# Altium PCB fader2_pcb.PcbDoc (part 1 of 3)
Units mil, origin at the board's own origin, x right, y up, seen from the top; angles counter-clockwise.
Board outline 5700 x 3900 mil, 6 copper layers (TOP, GND1, PWR1, PWR2, GND4, BOT), stack 48.468 mil thick; 196 components, 127 nets, 1359 pads, 531 vias.
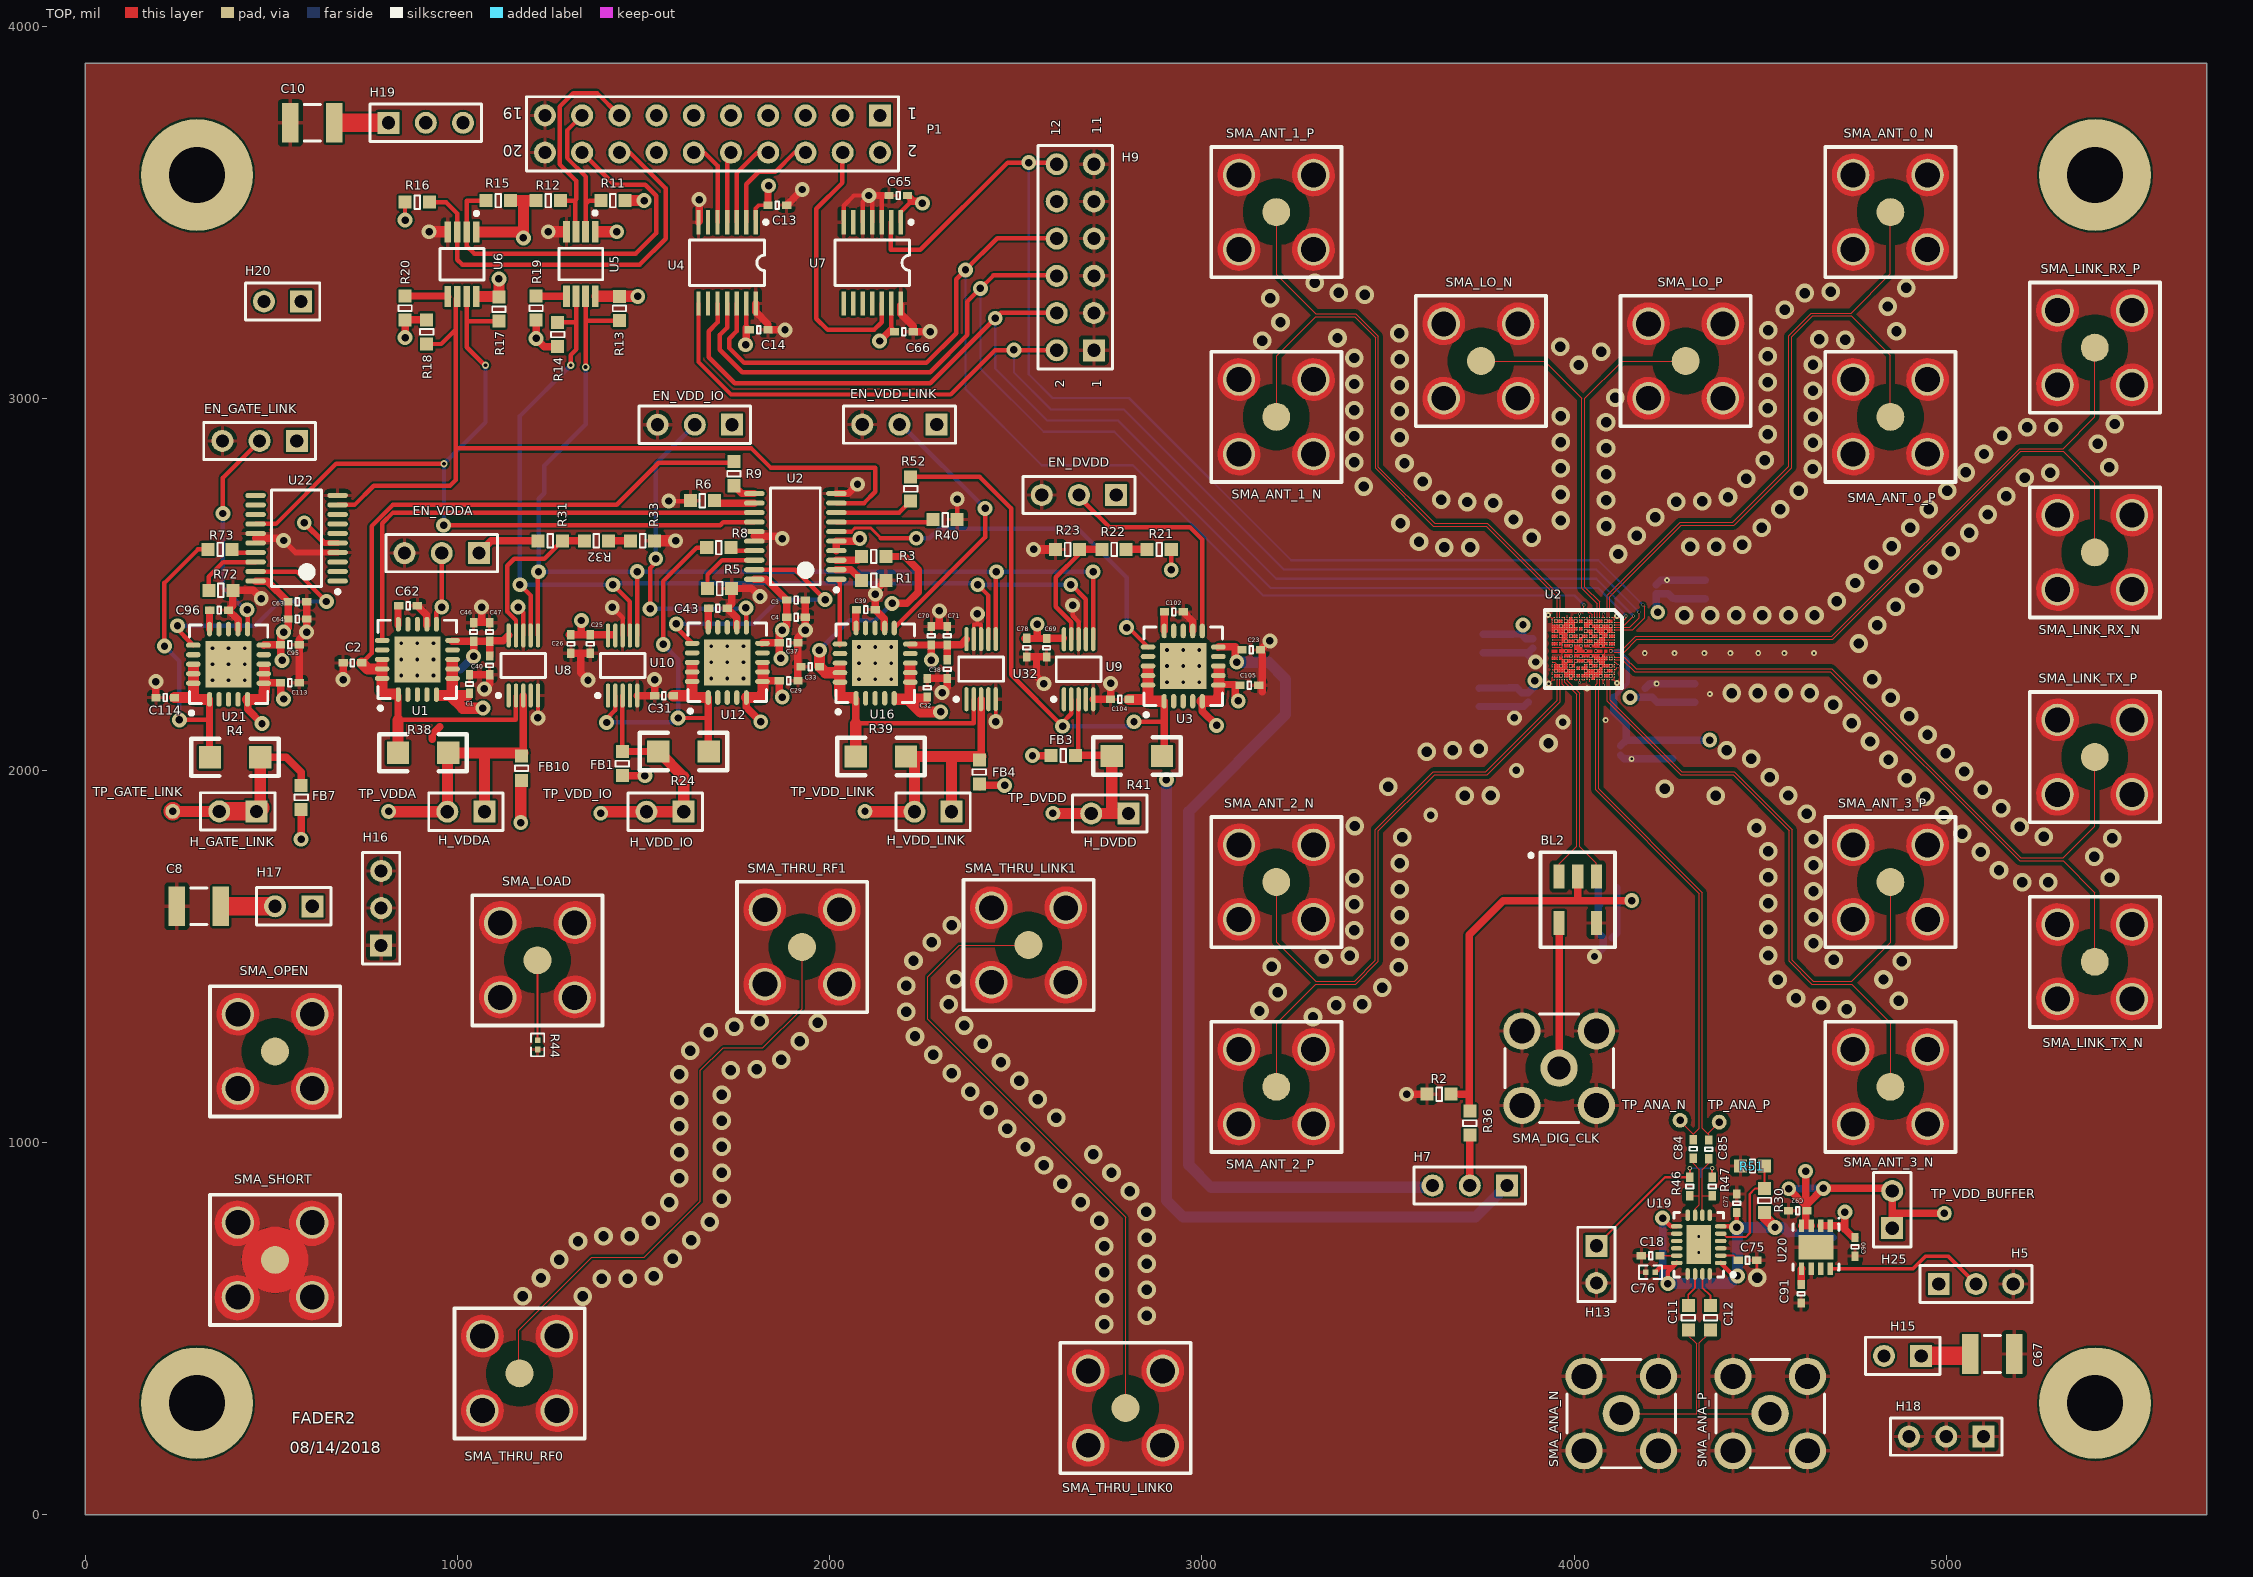
[diagram p0: TOP view]
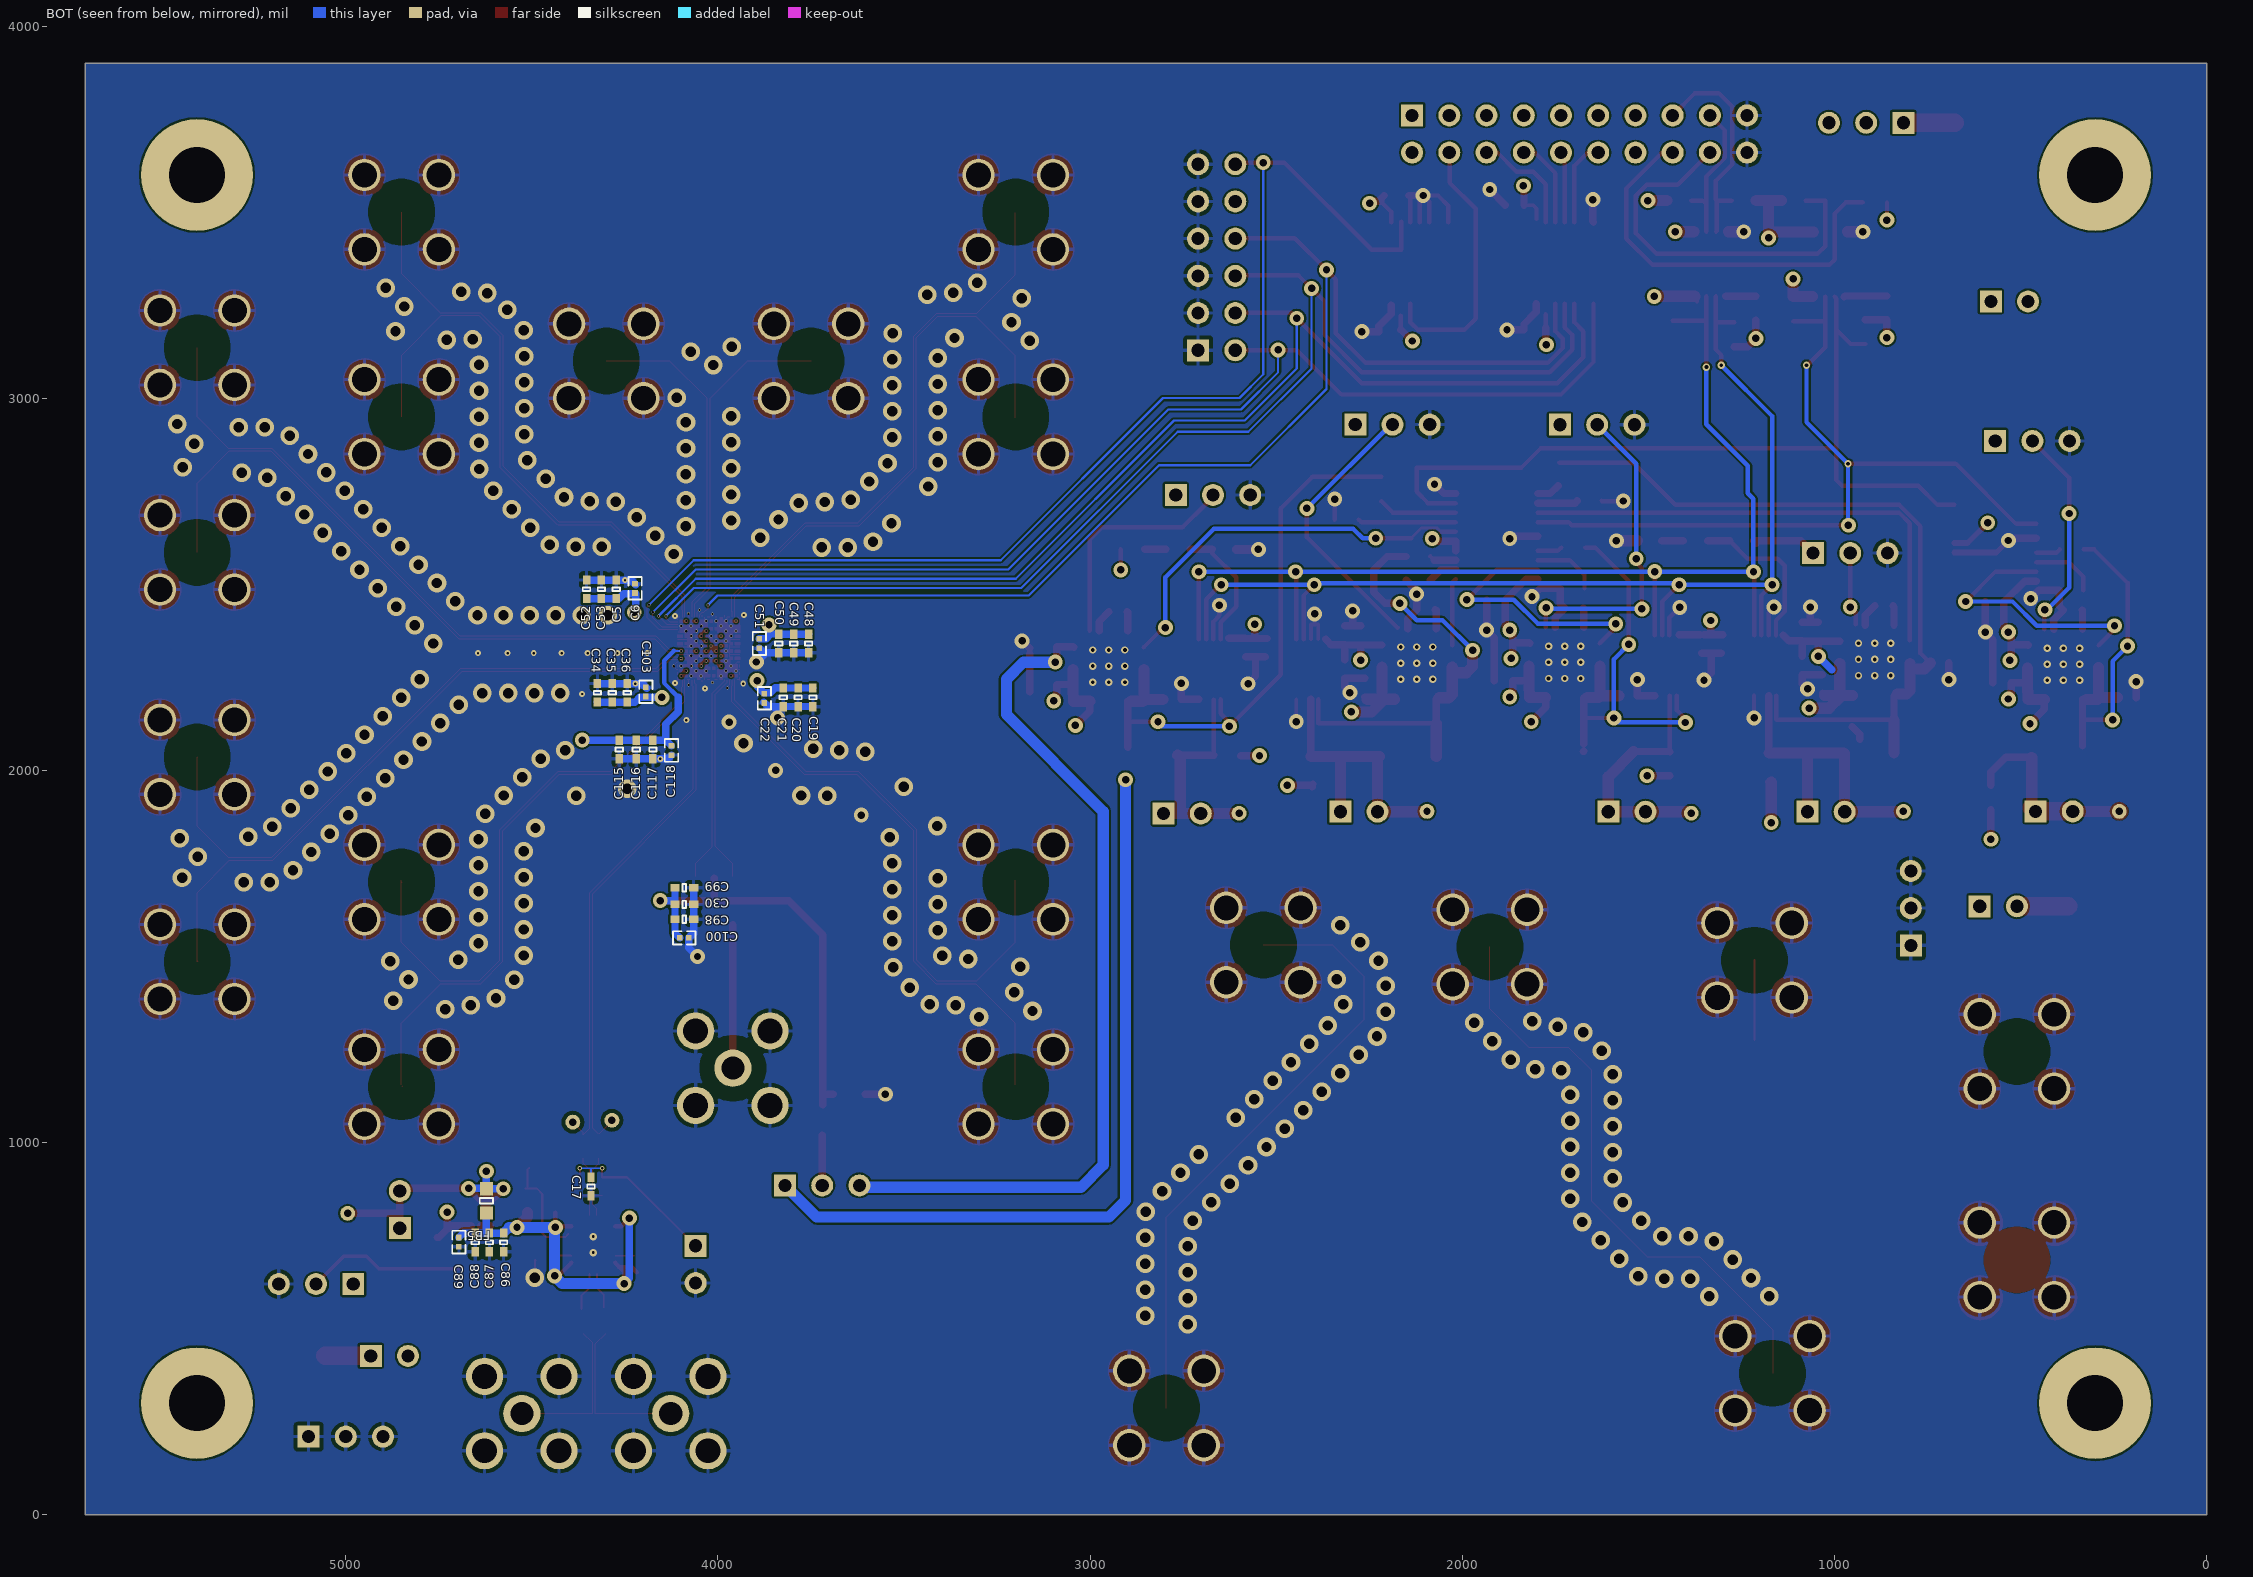
[diagram p1: BOT view, seen from below]
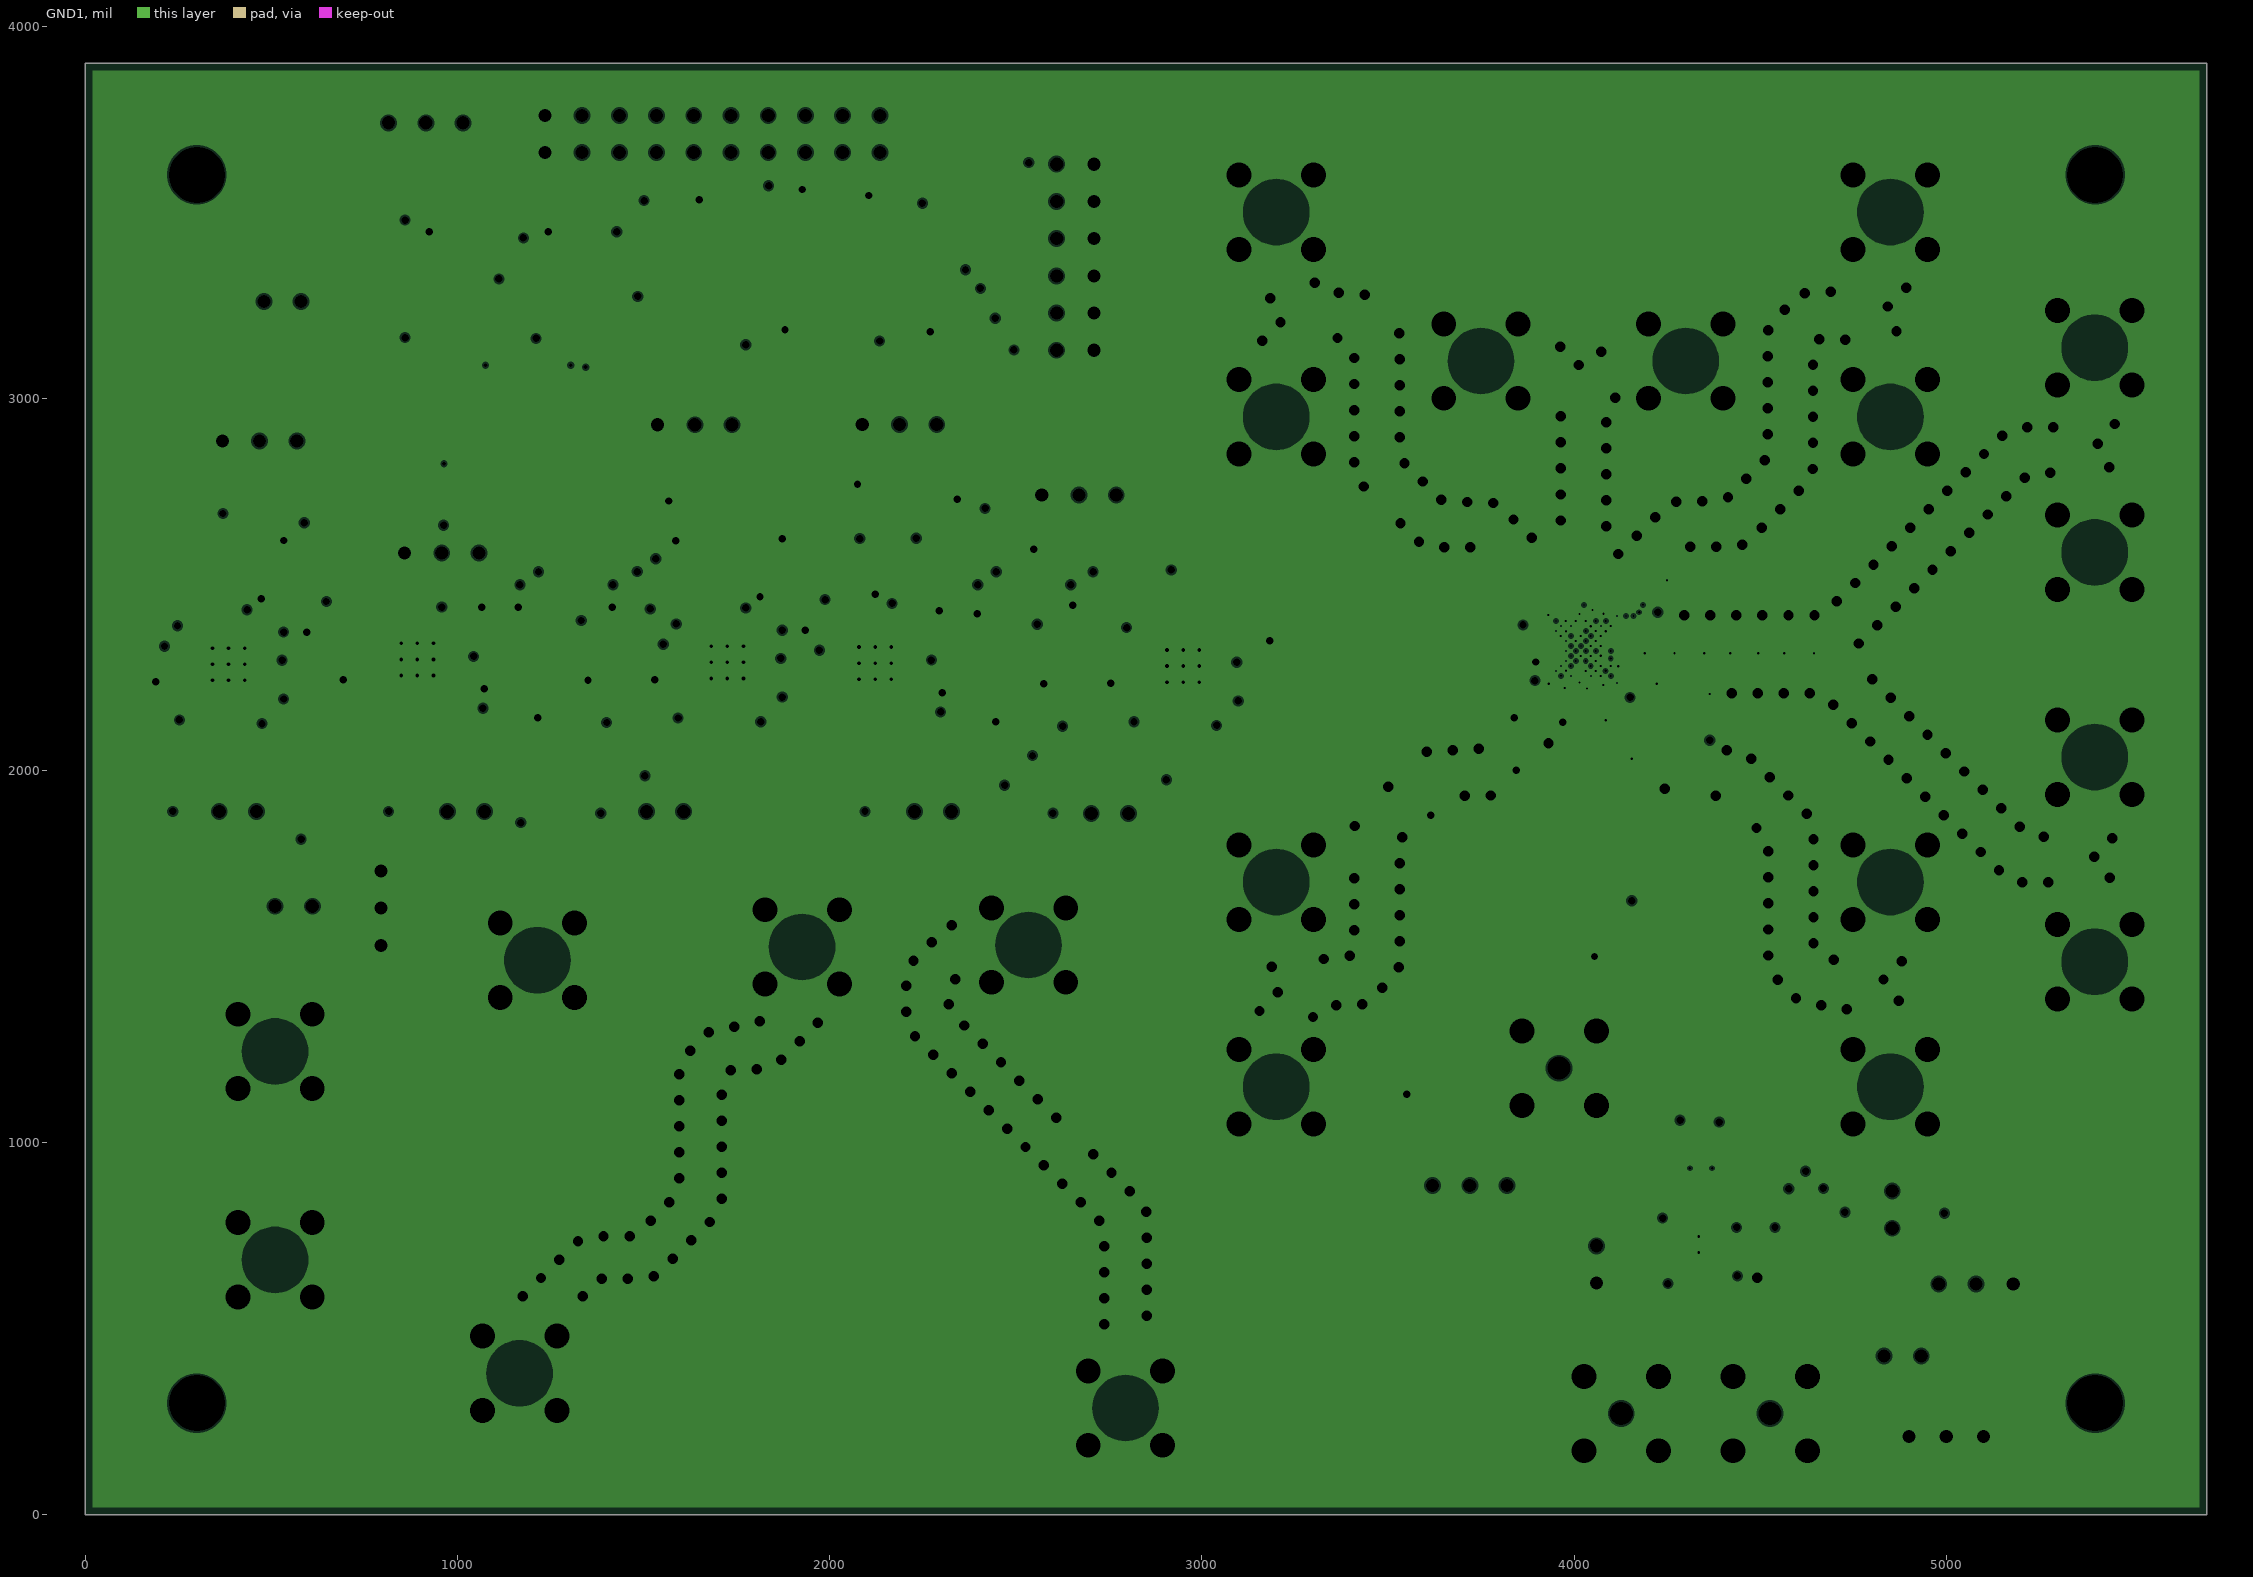
[diagram p2: GND1, clearances drawn from the general rule]
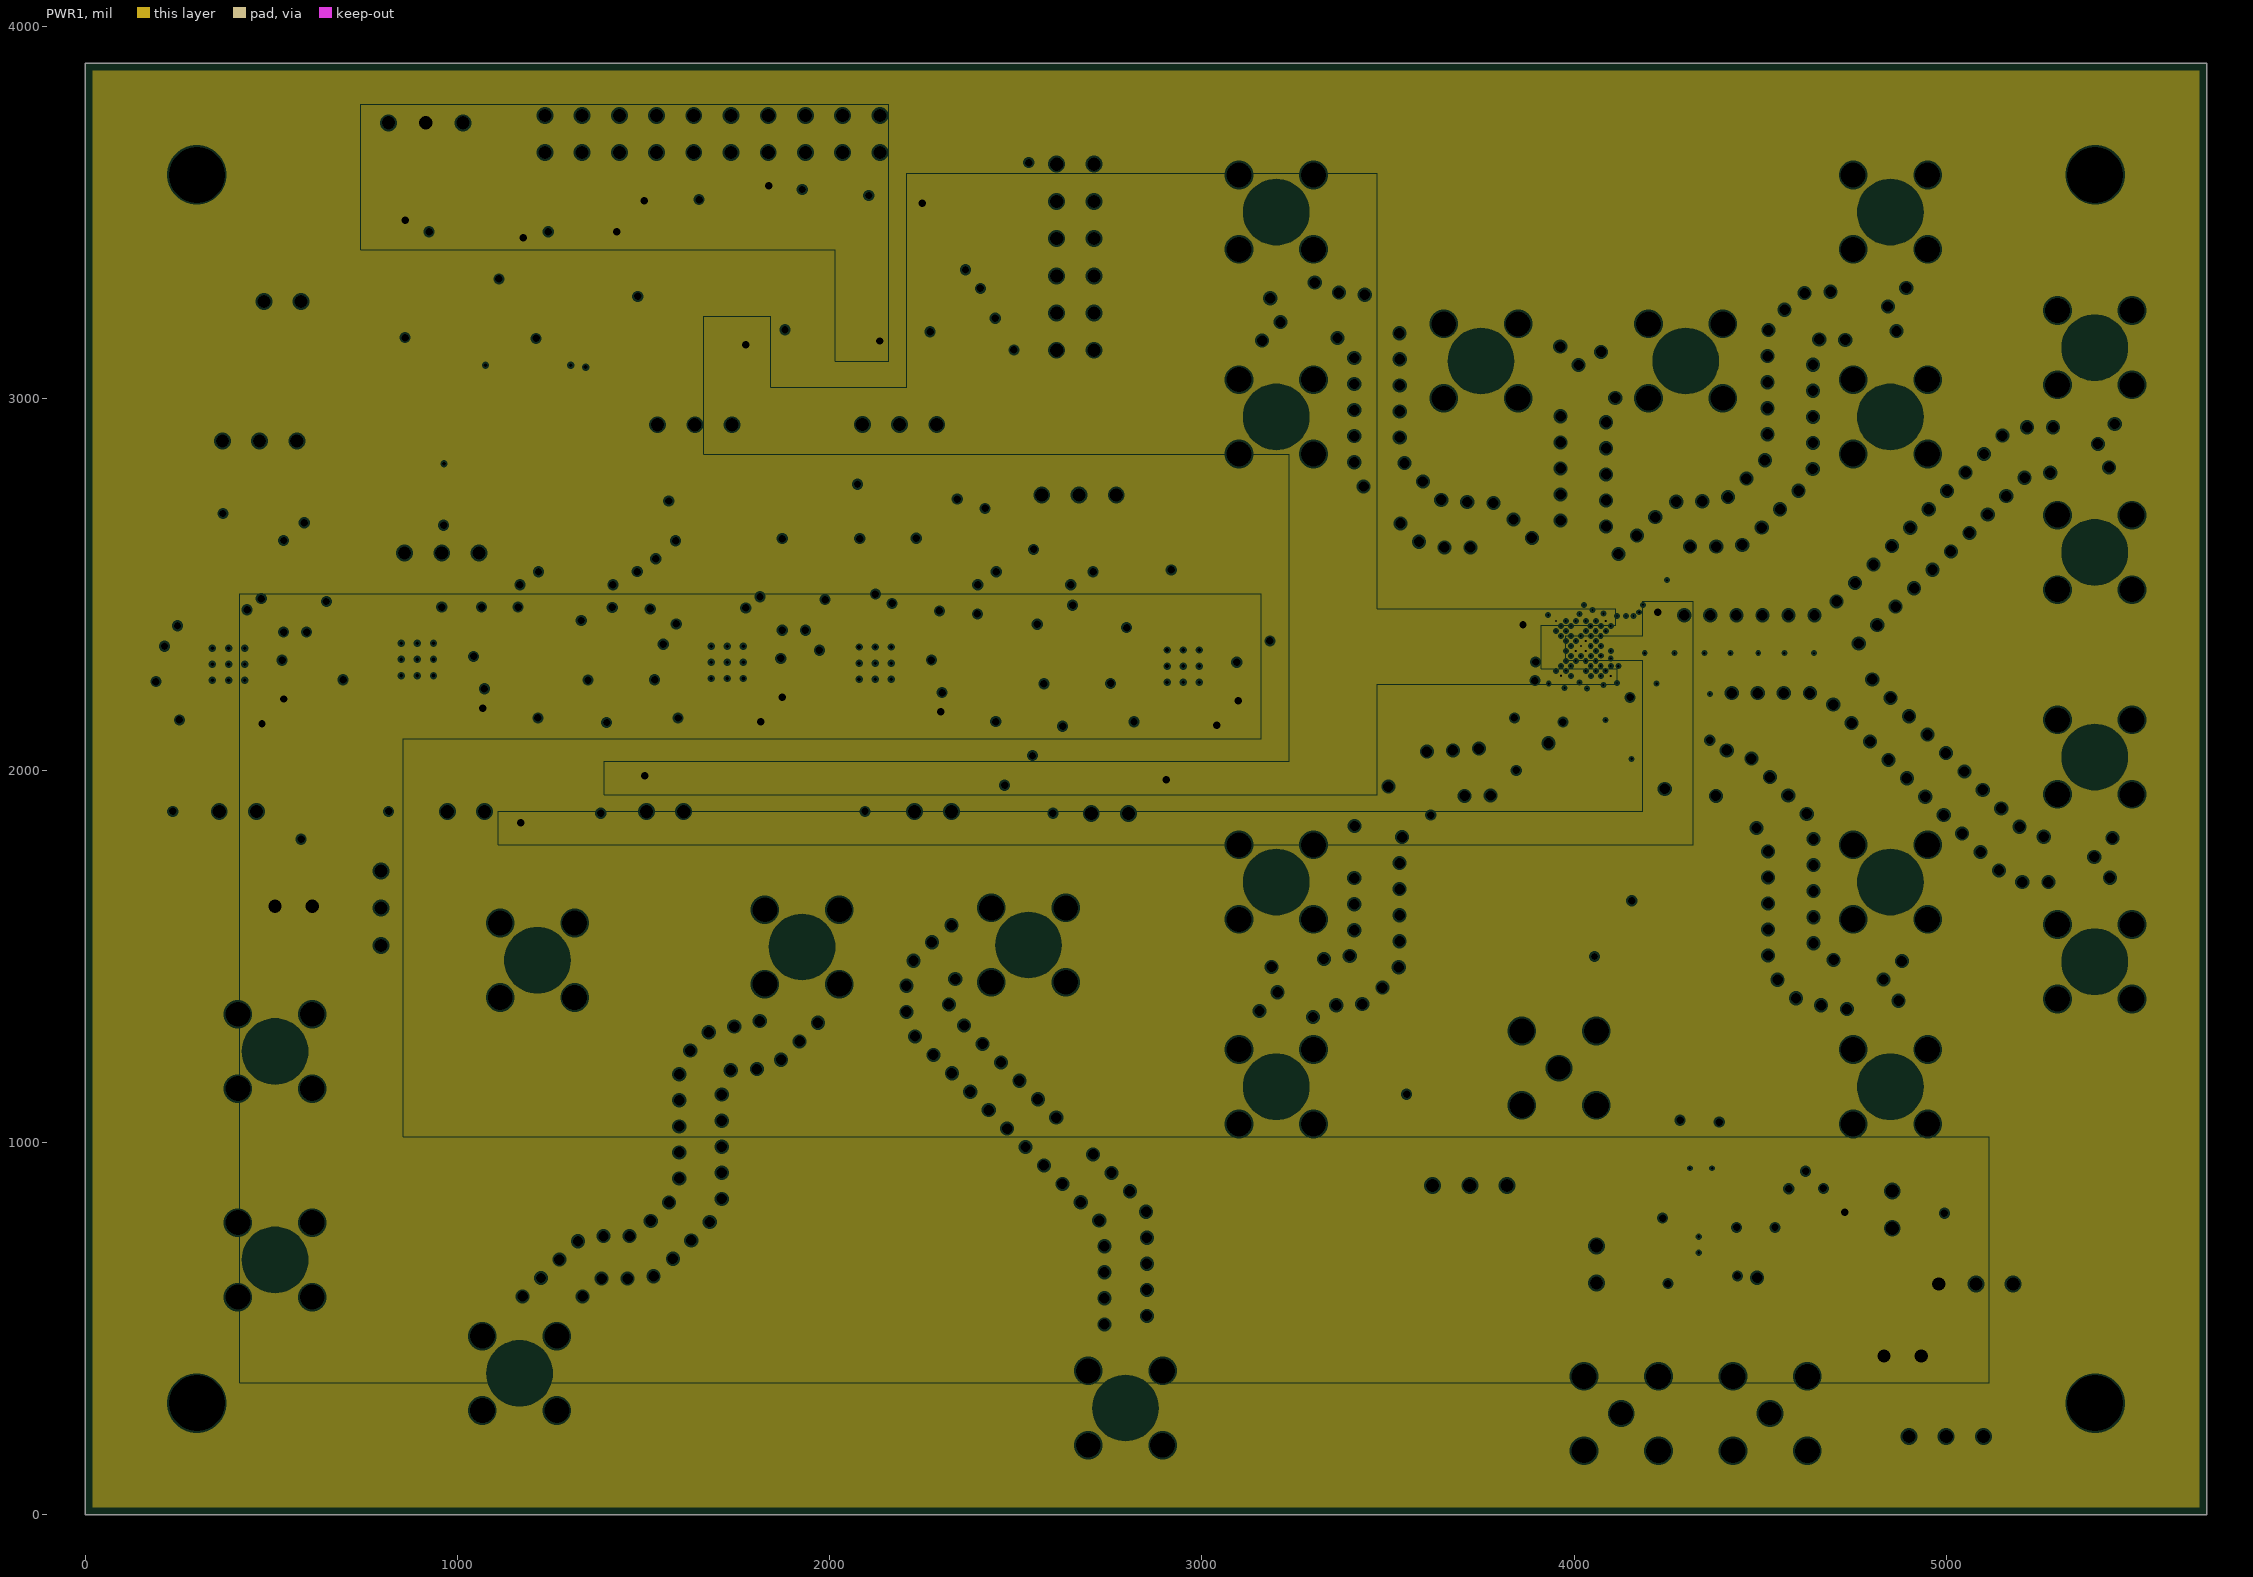
[diagram p3: PWR1, clearances drawn from the general rule]
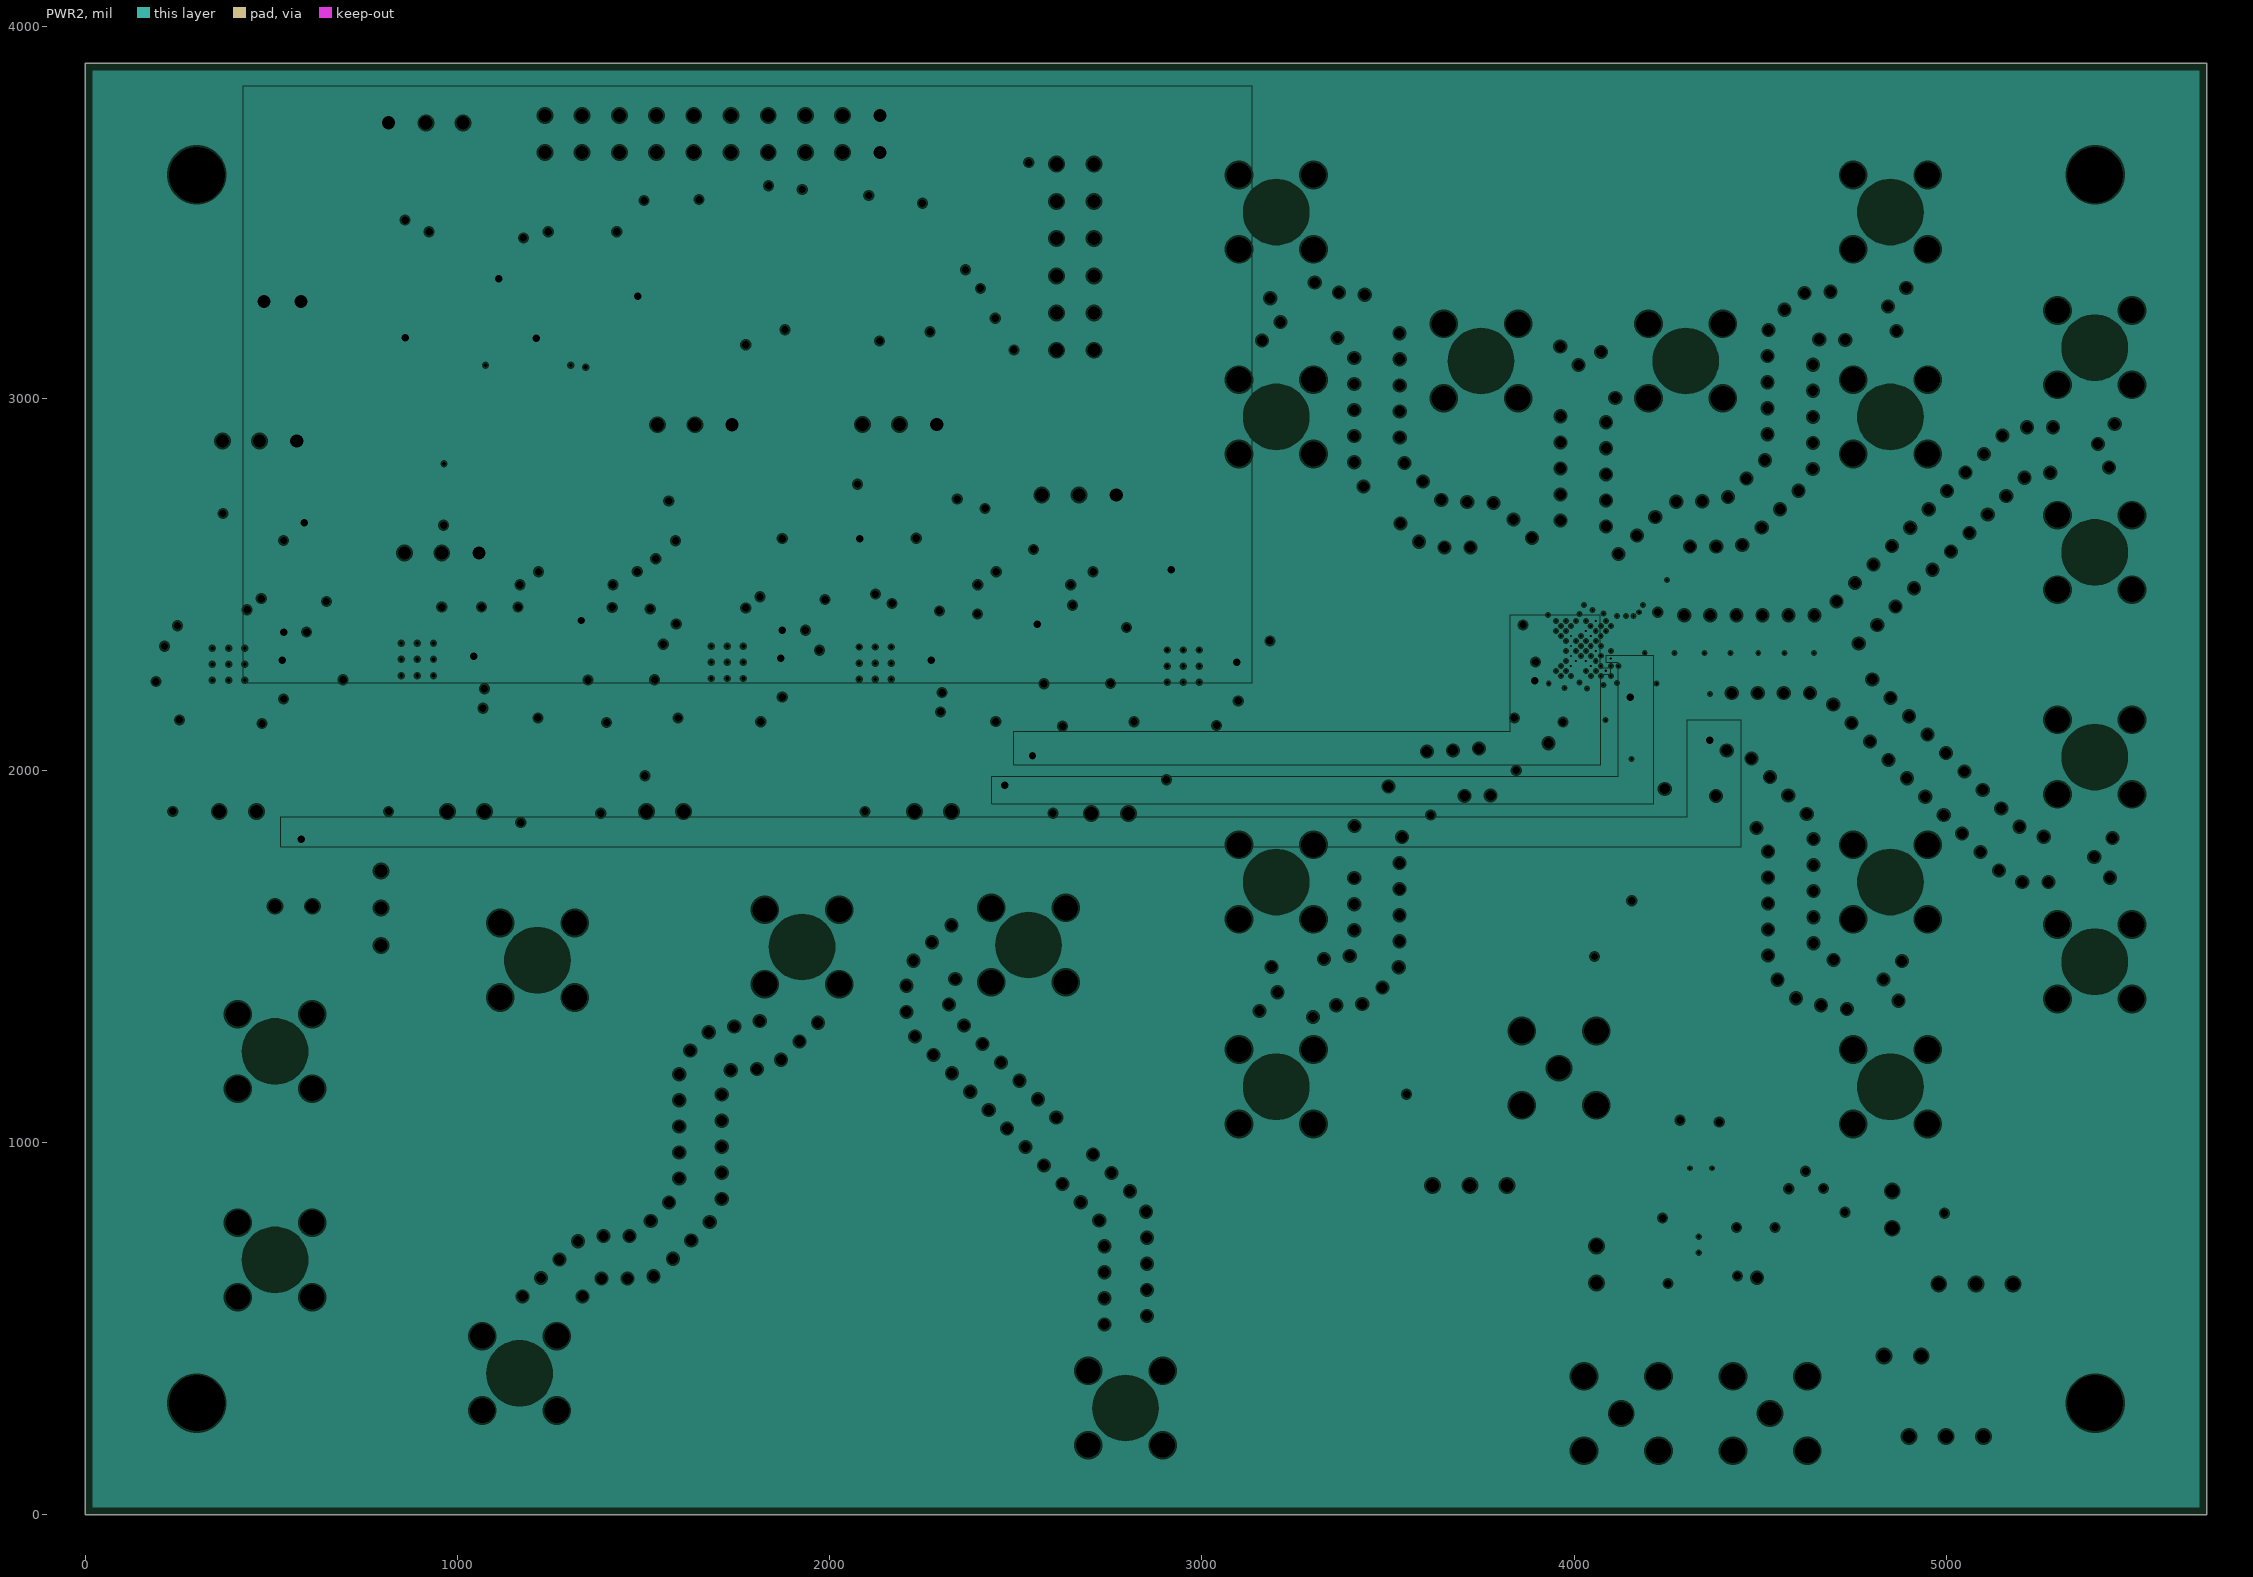
[diagram p4: PWR2, clearances drawn from the general rule]
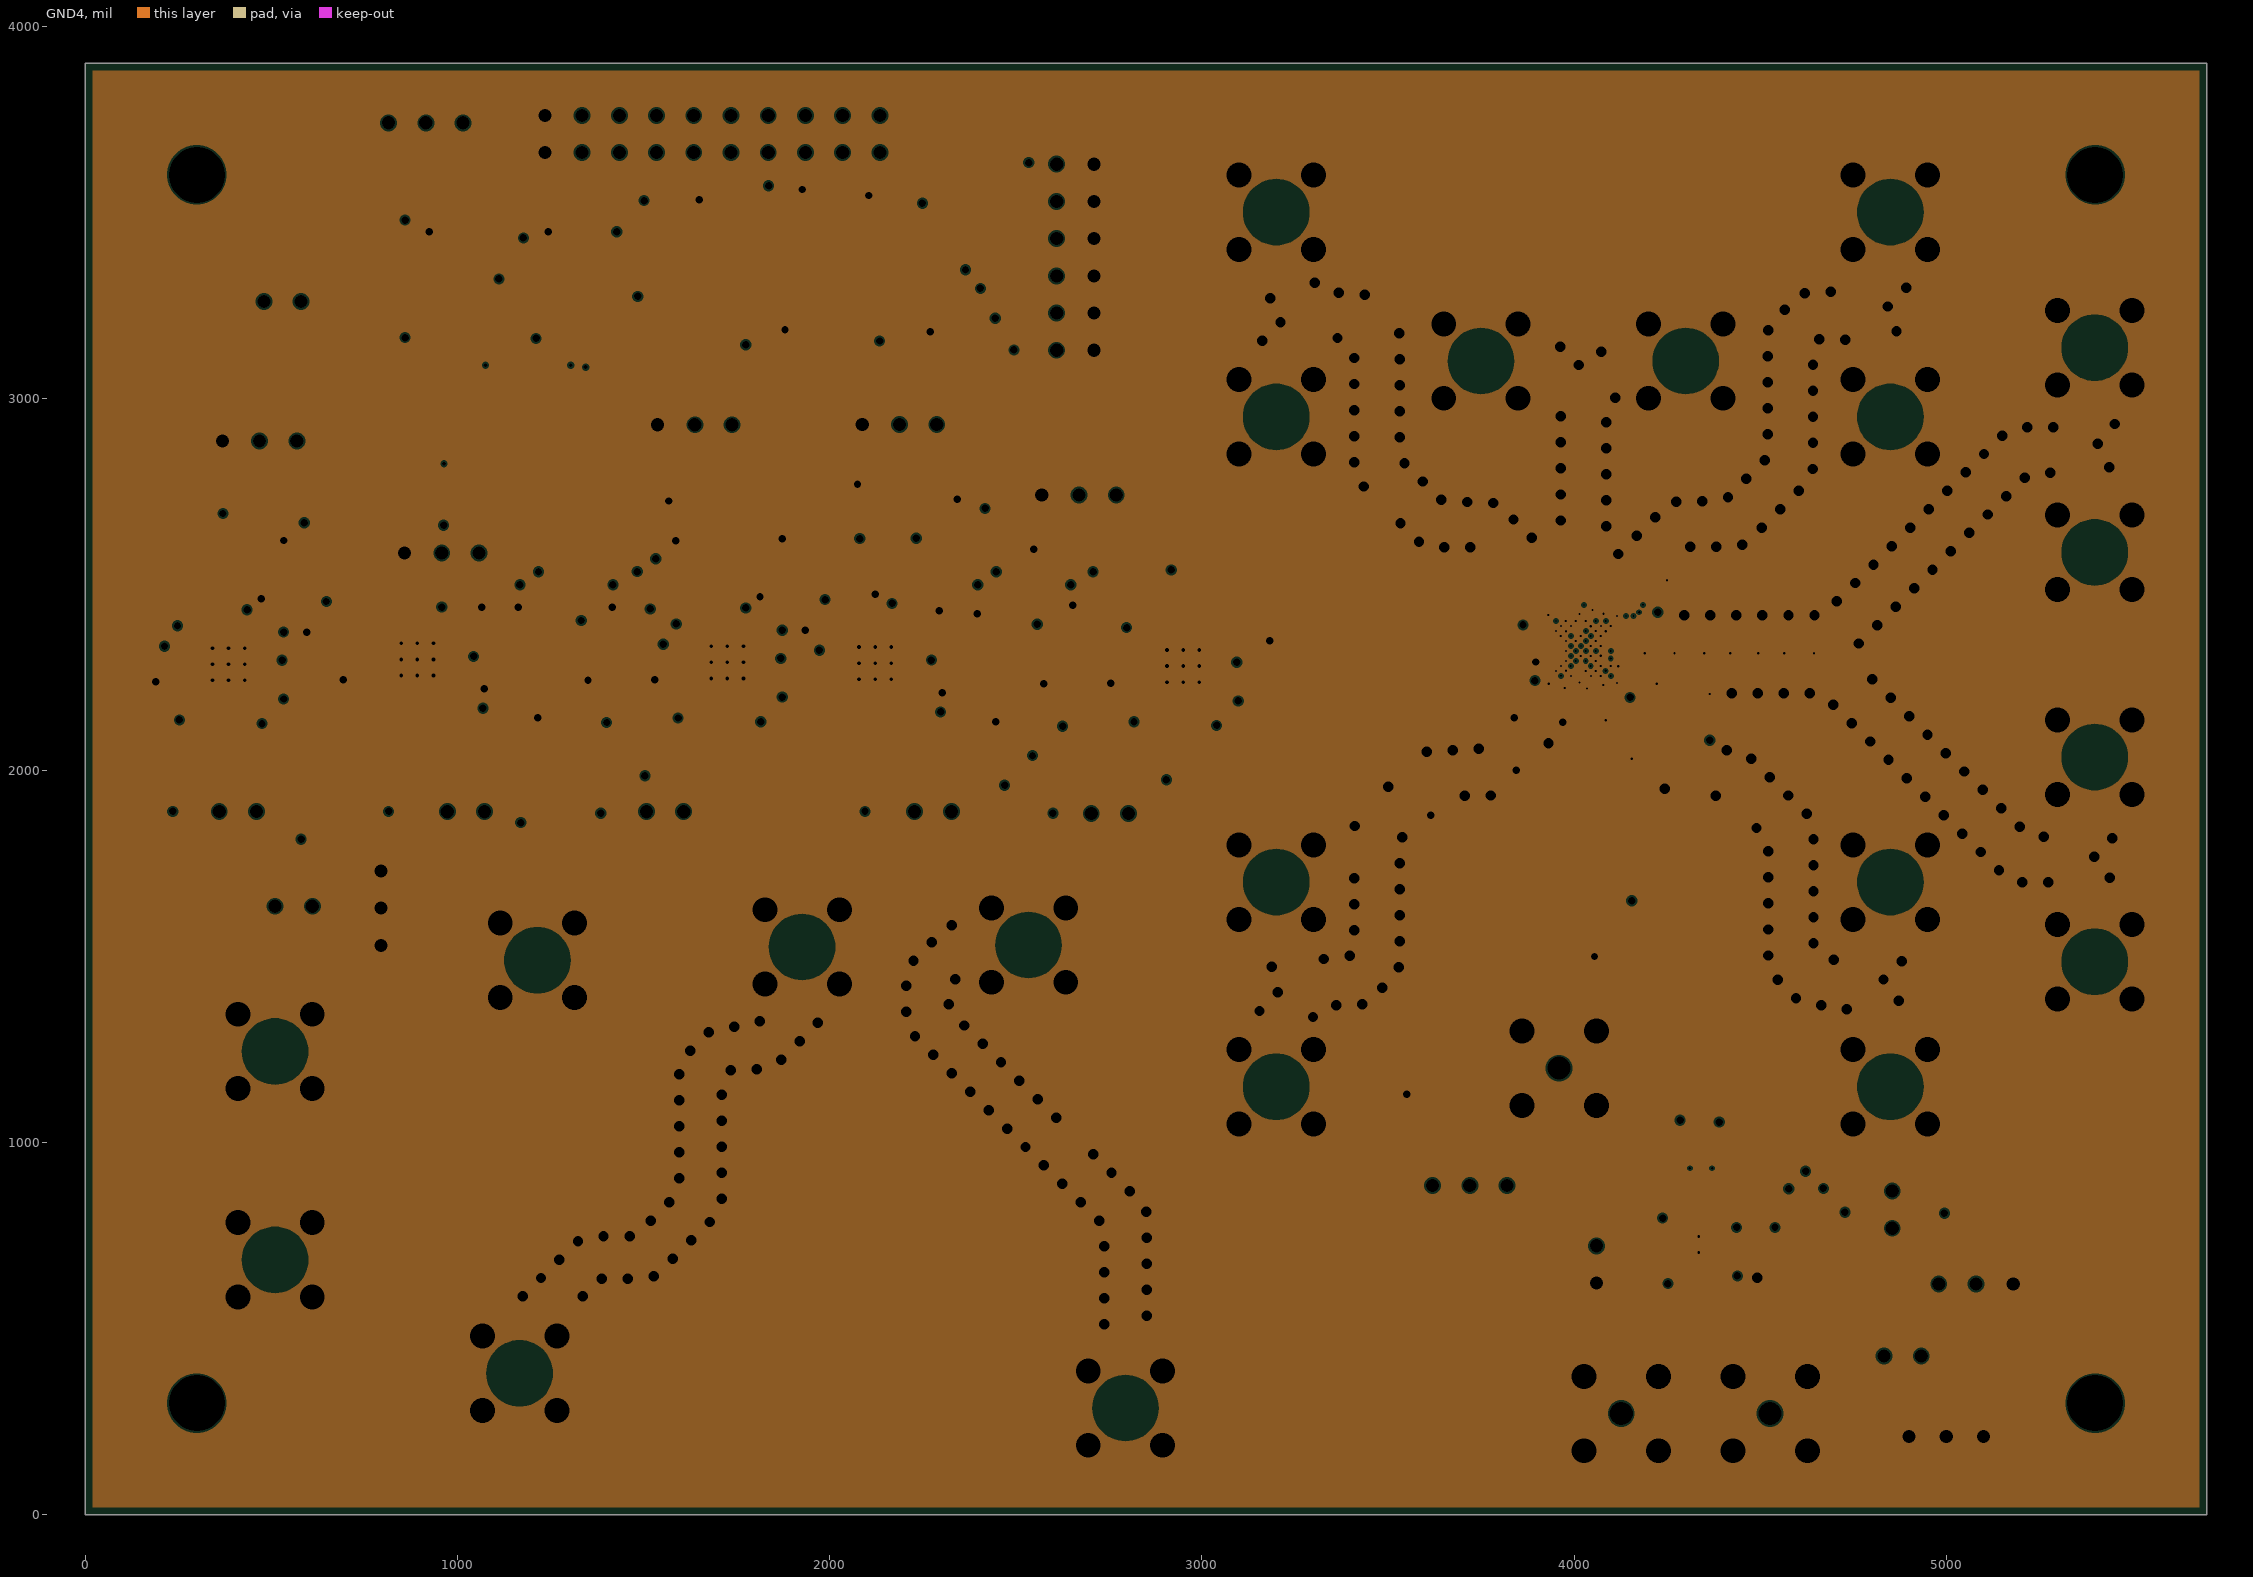
[diagram p5: GND4, clearances drawn from the general rule]

## Layer stack, top to bottom
Top Solder: solder mask 0.4, Solder Resist, Dk 3.5
TOP: signal copper 1.4
Dielectric 1: core 10, FR-4, Dk 4.2
GND1: plane copper 1.417, net VSS
Dielectric 3: prepreg 5, Dk 4.2
PWR1: plane copper 1.417, net (Multiple Nets)
Dielectric 6: core 10, Dk 4.2
PWR2: plane copper 1.417, net (Multiple Nets)
Dielectric 7: prepreg 5, Dk 4.2
GND4: plane copper 1.417, net VSS
Dielectric 2: core 10, Dk 4.2
BOT: signal copper 1.4
Bottom Solder: solder mask 0.4, Solder Resist, Dk 3.5

## Board outline
0,0 0,3900 5700,3900 5700,0

## Design rules (kind name [scope] priority, off if disabled: settings)
Clearance Clearance_CLKFPGA [InNet('CLK_FPGA_IN') vs IsRegion] p1: gap=10 ignorepadtopadclearanceinfootprint=FALSE except(0: Arc-Hole Track-Hole SMDPad-Hole THPad-Hole Via-Hole Fill-Hole Poly-Hole Region-Hole Text-Hole)
Clearance Clearance_CLKS [InNet('CLKS_IN') vs IsRegion] p2: gap=10 ignorepadtopadclearanceinfootprint=FALSE except(0: Arc-Hole Track-Hole SMDPad-Hole THPad-Hole Via-Hole Fill-Hole Poly-Hole Region-Hole Text-Hole)
Clearance Clearance_CLKF [InNet('CLKF_IN') vs IsRegion] p3: gap=10 ignorepadtopadclearanceinfootprint=FALSE except(0: Arc-Hole Track-Hole SMDPad-Hole THPad-Hole Via-Hole Fill-Hole Poly-Hole Region-Hole Text-Hole)
Clearance Clearance_LNA [InNet('LNA_OUT') vs IsRegion] p4: gap=10 ignorepadtopadclearanceinfootprint=FALSE except(0: Arc-Hole Track-Hole SMDPad-Hole THPad-Hole Via-Hole Fill-Hole Poly-Hole Region-Hole Text-Hole)
Clearance Clearance_Ant [InNet('ANT_P') vs IsRegion] p5: gap=10 ignorepadtopadclearanceinfootprint=FALSE except(0: Arc-Hole Track-Hole SMDPad-Hole THPad-Hole Via-Hole Fill-Hole Poly-Hole Region-Hole Text-Hole)
Clearance "Clearance_Diff Pairs Bottom" [(InDifferentialPairClass('All Differential Pairs')) vs OnLayer('bot') And IsRegion] p6: gap=10 ignorepadtopadclearanceinfootprint=FALSE except(0: Arc-Hole Track-Hole SMDPad-Hole THPad-Hole Via-Hole Fill-Hole Poly-Hole Region-Hole Text-Hole)
Clearance "Clearance_Diff Pairs Sig1" [(InDifferentialPairClass('All Differential Pairs')) vs OnLayer('SIG1') And IsRegion] p7: gap=10 ignorepadtopadclearanceinfootprint=FALSE except(0: Arc-Hole Track-Hole SMDPad-Hole THPad-Hole Via-Hole Fill-Hole Poly-Hole Region-Hole Text-Hole)
Clearance "Clearance_Diff Pairs Top" [(InDifferentialPairClass('All Differential Pairs')) vs OnLayer('top') And IsRegion] p8: gap=10 ignorepadtopadclearanceinfootprint=FALSE except(0: Arc-Hole Track-Hole SMDPad-Hole THPad-Hole Via-Hole Fill-Hole Poly-Hole Region-Hole Text-Hole)
Clearance Clearance_Fill [All vs IsRegion] p9: gap=5 ignorepadtopadclearanceinfootprint=FALSE except(0: Arc-Hole Track-Hole SMDPad-Hole THPad-Hole Via-Hole Fill-Hole Poly-Hole Region-Hole Text-Hole)
Clearance Clearance_TDD [WithinRoom('TDD_Chip')] p10: gap=3 ignorepadtopadclearanceinfootprint=FALSE except(0: Arc-Hole Track-Hole SMDPad-Hole THPad-Hole Via-Hole Fill-Hole Poly-Hole Region-Hole Text-Hole)
Clearance [All] p11: gap=3 ignorepadtopadclearanceinfootprint=FALSE except(0: Arc-Hole Track-Hole SMDPad-Hole THPad-Hole Via-Hole Fill-Hole Poly-Hole Region-Hole Text-Hole)
DiffPairsRouting [All] p1: maxlimit=4.89 minlimit=3 mostfreqgap=4.89 toplayer_minwidth=3 toplayer_maxwidth=3 toplayer_prefwidth=3 bottomlayer_maxgap=4.1 bottomlayer_prefgap=4.1 bottomlayer_minwidth=3.8 bottomlayer_maxwidth=3.8 bottomlayer_prefwidth=3.8 maxuncoupledlength=100
HoleSize [All] p1: absolutevalues=TRUE maxlimit=187 minlimit=4 maxpercent=80.000 minpercent=20.000
HoleToHoleClearance [All] p1: gap=5 allowstackedmicrovias=TRUE
MinimumSolderMaskSliver [All] p1: minsoldermaskwidth=5
NetAntennae [All] p1: netantennaetolerance=500
PlaneClearance PlaneClearance_small [InRegionRelative(320,425,395,350)] p1: clearance=3
PlaneClearance [All] p2: clearance=5
PlaneConnect NormalVia [All] p1: planeconnectstyle=Direct reliefexpansion=5 reliefentries=4 reliefconductorwidth=5 reliefairgap=5
PolygonConnect PolygonConnect_2 [(InPadClass('All Pads')) vs IsNamedPolygon('TOP-GND')] p1: connectstyle=Relief reliefconductorwidth=10 reliefentries=4 polygonreliefangle="90 Angle" airgapwidth=10
PolygonConnect PolygonConnect_1 [(InPadClass('All Pads')) vs IsNamedPolygon('BOT-GND')] p2: connectstyle=Relief reliefconductorwidth=10 reliefentries=4 polygonreliefangle="90 Angle" airgapwidth=10
PolygonConnect PolygonConnect_Via [IsVia] p3: connectstyle=Direct reliefconductorwidth=10 reliefentries=4 polygonreliefangle="90 Angle" airgapwidth=10
PolygonConnect [IsThruPin] p4: connectstyle=Relief reliefconductorwidth=12 reliefentries=4 polygonreliefangle="45 Angle" airgapwidth=8
RoutingVias [All] p1: holewidth=10 width=20 viastyle="Through Hole" minholewidth=4 minwidth=6 maxholewidth=20 maxwidth=40
SilkToSilkClearance [All] p1: silktosilkclearance=5
SilkToSolderMaskClearance [IsPad] p1: minsilkscreentomaskgap=5 clearancetoexposedcopper=TRUE
SolderMaskExpansion SolderMaskExpansionFader2 [HasFootprint('FADER2')] p1: expansion=0.16
SolderMaskExpansion [All] p2: expansion=2
Width Width_TDD [WithinRoom('TDD_Chip')] p1: maxlimit=10 minlimit=3 preferedwidth=5
Width Width_Pwr [InNetClass('Pwr_Gnd')] p2: maxlimit=50 minlimit=3 preferedwidth=10
Width [All] p3: maxlimit=50 minlimit=3 preferedwidth=5.75
21 further rules are at their usual default settings.

## Classes and differential pairs
component class U_Supplies: H20
component class U_BB_analog: C11 C12 C17 C18 C75 C76 C77 C84 C85 H13 R30 R46 R47 R51 SMA_ANA_N SMA_ANA_P TP_ANA_N TP_ANA_P U19
component class Top: C8 C67 H9 H15 H16 H17 H18
component class U_FPGA_interface: C10 H19 P1
component class U_Lvl_Shifters: C13 C14 C65 C66 R11 R12 R13 R14 R15 R16 R17 R18 R19 R20 U4 U5 U6 U7
component class U_SMA_RF_CLK: BL2 C30 C98 C99 C100 H7 R2 R36 SMA_ANT_0_N SMA_ANT_0_P SMA_ANT_1_N SMA_ANT_1_P SMA_ANT_2_N SMA_ANT_2_P SMA_ANT_3_N SMA_ANT_3_P SMA_DIG_CLK SMA_LINK_RX_N SMA_LINK_RX_P SMA_LINK_TX_N SMA_LINK_TX_P SMA_LO_N SMA_LO_P
component class U_Supplies_Isense: C25 C26 C46 C47 C69 C70 C71 C78 R21 R22 R23 R31 R32 R33 U8 U9 U10 U32
component class U_Supplies_LDO: C1 C2 C5 C6 C19 C20 C21 C22 C23 C29 C31 C32 C33 C34 C35 C36 C37 C38 C39 C40 C43 C48 C49 C50 C51 C52 C53 C62 C86 C87 C88 C89 C90 C91 C92 C95 C96 C102 C103 C104 C105 C113 C114 C115 C116 C117 C118 EN_DVDD EN_GATE_LINK EN_VDD_IO EN_VDD_LINK EN_VDDA FB1 FB3 FB4 FB5 FB6 FB7 FB10 H5 H25 H_DVDD H_GATE_LINK H_VDD_IO H_VDD_LINK H_VDDA R4 R24 R38 R39 R41 TP_DVDD TP_GATE_LINK TP_VDD_BUFFER TP_VDD_IO TP_VDD_LINK TP_VDDA U1 U3 U12 U16 U20 U21
component class U_Supplies_Pots: C3 C4 C63 C64 R1 R3 R5 R6 R8 R9 R40 R52 R72 R73 U2 U22
component class U_Fader2: U2
component class U_De_Embed: R44 SMA_LOAD SMA_OPEN SMA_SHORT SMA_THRU_LINK0 SMA_THRU_LINK1 SMA_THRU_RF0 SMA_THRU_RF1
differential pair LINK_CM_TX_1: +LINK_CM_TX_1_P -LINK_CM_TX_1_N
differential pair LINK_CM_RX_1: +LINK_CM_RX_1_P -LINK_CM_RX_1_N
differential pair rx_buf_out: +rx_buf_out_P -rx_buf_out_N
differential pair rx_buf_in: +rx_buf_in_P -rx_buf_in_N
differential pair ANA_MUX: +ANA_MUX_P -ANA_MUX_N
differential pair ANT_0: +ANT_0_P -ANT_0_N
differential pair ANT_1: +ANT_1_P -ANT_1_N
differential pair ANT_2: +ANT_2_P -ANT_2_N
differential pair ANT_3: +ANT_3_P -ANT_3_N
differential pair CLK_DIG_OVERRIDE: +CLK_DIG_OVERRIDE_P -CLK_DIG_OVERRIDE_N
differential pair LO_OVERRIDE: +LO_OVERRIDE_P -LO_OVERRIDE_N

## Components (designator, comment, footprint, x,y, rotation, side; value= is the part's Value field where it differs from the comment)
BL2 "TC1.5-52TG2+" AT224-3 4010,1715 r0 top
C1 "3.3uF" 0402 1032.31,2207.24 r90 top
C2 "1uF" 0402 742.82,2288.83 r180 top
C3 "100nF" 0402 1884.82,2457.83 r0 top value=0.1uF
C4 "3.3uF" 0402 1884.82,2411.83 r0 top
C5 "10nF" 0402 4273.18,2461.78 r90 bottom value=10000pF
C6 "100pF" 0201 4222.88,2476.78 r90 bottom
C8 "22uF" 1210 305,1635 r180 top
C10 "22uF" 1210 610,3740 r180 top
C11 "1uF" 0603 4306.97,562.08 r270 top
C12 "1uF" 0603 4366.97,497.08 r90 top
C13 "3.3uF" 0402 1834.41,3518.82 r0 top
C14 "3.3uF" 0402 1784.41,3183.82 r0 top
C17 "100nF" 0402 4341.21,907.06 r270 bottom value=0.1uF
C18 "3.3uF" 0402 4231.05,695.84 r180 top
C19 "3.3uF" 0402 3744.84,2221.22 r270 bottom
C20 "220nF" 0402 3784.84,2221.22 r270 bottom value=0.22uF
C21 "10nF" 0402 3824.84,2221.22 r270 bottom value=10000pF
C22 "100pF" 0201 3875.14,2206.22 r270 bottom
C23 "1uF" 0402 3107.82,2323.83 r0 top
C25 "3.3uF" 0402 1356.82,2364.83 r270 top
C26 "100nF" 0402 1304.82,2364.83 r270 top value=0.1uF
C29 "3.3uF" 0402 1864.82,2240.83 r0 top
C30 "220nF" 0402 4115.5,1640 r180 bottom value=0.22uF
C31 "1uF" 0402 1579.82,2200.83 r180 top
C32 "3.3uF" 0402 2262.31,2197.24 r90 top
C33 "1uF" 0402 1972.82,2278.83 r180 top
C34 "3.3uF" 0402 4323.9,2183.72 r90 bottom
C35 "220nF" 0402 4283.9,2183.72 r90 bottom value=0.22uF
C36 "10nF" 0402 4243.9,2183.72 r90 bottom value=10000pF
C37 "1uF" 0402 1864.82,2342.83 r0 top
C38 "1uF" 0402 2316.31,2297.24 r270 top
C39 "10nF" 0402 2072.31,2432.24 r0 top value=10000pF
C40 "1uF" 0402 1086.31,2307.24 r270 top
C43 "10nF" 0402 1674.82,2435.83 r0 top value=10000pF
C46 "3.3uF" 0402 1043.31,2346.93 r90 top
C47 "100nF" 0402 1086.31,2346.93 r90 top value=0.1uF
C48 "3.3uF" 0402 3756.57,2365.97 r270 bottom
C49 "220nF" 0402 3796.57,2365.97 r270 bottom value=0.22uF
C50 "10nF" 0402 3836.57,2365.97 r270 bottom value=10000pF
C51 "100pF" 0201 3888.57,2353.47 r270 bottom
C52 "3.3uF" 0402 4353.18,2461.78 r90 bottom
C53 "220nF" 0402 4313.18,2461.78 r90 bottom value=0.22uF
C62 "10nF" 0402 842.31,2442.24 r0 top value=10000pF
C63 "100nF" 0402 544.82,2452.83 r0 top value=0.1uF
C64 "3.3uF" 0402 544.82,2406.83 r0 top
C65 "3.3uF" 0402 2209.41,3544.67 r180 top
C66 "3.3uF" 0402 2174.41,3178.82 r0 top
C67 "22uF" 1210 5123.86,431.97 r0 top
C69 "100nF" 0402 2582.82,2354.55 r270 top value=0.1uF
C70 "3.3uF" 0402 2273.31,2336.93 r90 top
C71 "100nF" 0402 2316.31,2336.93 r90 top value=0.1uF
C75 "100nF" 0402 4441.05,683.84 r0 top value=0.1uF
C76 "680pF" 0201 4218.05,651.84 r180 top
C77 "100nF" 0402 4437,812 r90 top value=0.1uF
C78 "3.3uF" 0402 2529.82,2354.83 r270 top
C84 "10nF" 0402 4320,1008 r270 top value=10000pF
C85 "10nF" 0402 4362,1007 r270 top value=10000pF
C86 "3.3uF" 0402 4576.05,757 r270 bottom
C87 "220nF" 0402 4614.05,757 r270 bottom value=0.22uF
C88 "10nF" 0402 4652.05,757 r270 bottom value=10000pF
C89 "100pF" 0201 4696.05,745 r270 bottom
C90 "1uF" 0402 4755,745 r270 top
C91 "10nF" 0402 4610.05,619 r270 top value=10000pF
C92 "1uF" 0402 4626.05,817 r180 top
C95 "1uF" 0402 524.82,2337.83 r0 top
C96 "10nF" 0402 334.82,2430.83 r0 top value=10000pF
C98 "10nF" 0402 4115.5,1600 r180 bottom value=10000pF
C99 "3.3uF" 0402 4115.5,1685 r180 bottom
C100 "100pF" 0201 4103,1550 r180 bottom
C102 "10nF" 0402 2899.82,2425.83 r0 top value=10000pF
C103 "100pF" 0201 4193.61,2198.72 r90 bottom
C104 "1uF" 0402 2804.82,2190.83 r180 top
C105 "3.3uF" 0402 3102.82,2228.83 r0 top
C113 "3.3uF" 0402 524.82,2235.83 r0 top
C114 "1uF" 0402 239.82,2195.83 r180 top
C115 "3.3uF" 0402 4265.26,2081.14 r270 bottom
C116 "220nF" 0402 4219.84,2081.22 r270 bottom value=0.22uF
C117 "10nF" 0402 4174.84,2081.22 r270 bottom value=10000pF
C118 "100pF" 0201 4124.84,2066.22 r270 bottom
EN_DVDD "Header_3" HDR1X3 2770,2740 r180 top
EN_GATE_LINK "Header_3" HDR1X3 568.41,2885.32 r180 top
EN_VDD_IO "Header_3" HDR1X3 1737.82,2928.83 r180 top
EN_VDD_LINK "Header_3" HDR1X3 2287.74,2929.06 r180 top
EN_VDDA "Header_3" HDR1X3 1057.82,2583.83 r180 top
FB1 "Ferrite Bead" 0603 1443.04,2050.83 r270 top
FB3 "Ferrite Bead" 0603 2660,2040 r180 top
FB4 "Ferrite Bead" 0603 2402.31,2028.24 r270 top
FB5 "Ferrite Bead" 0603 4622.05,876 r270 bottom
FB7 "Ferrite Bead" 0603 580,1960 r270 top
FB10 "Ferrite Bead" 0603 1172.31,2038.24 r270 top
H5 "Header_3" HDR1X3 4980,620 r0 top
H7 "Header_3" HDR1X3 3820,885 r180 top
H9 "Header 6X2" HDR2X6 2710,3128.82 r90 top
H13 "Header_2" HDR1X2 4060.05,722.67 r270 top
H15 "Header_2" HDR1X2 4932.92,426.97 r180 top
H16 "Header_3" HDR1X3 795,1530 r90 top
H17 "Header_2" HDR1X2 610,1635 r180 top
H18 "Header_3" HDR1X3 5100,210 r180 top
H19 "Header_3" HDR1X3 815,3740 r0 top
H20 "Header_2" HDR1X2 580,3260 r180 top
H25 "Header_2" HDR1X2 4855,770 r90 top
H_DVDD "Header_2" HDR1X2 2802.82,1884.14 r180 top
H_GATE_LINK "Header_2" HDR1X2 460,1890 r180 top
H_VDD_IO "Header_2" HDR1X2 1607.82,1889.14 r180 top
H_VDD_LINK "Header_2" HDR1X2 2327.82,1889.14 r180 top
H_VDDA "Header_2" HDR1X2 1072.82,1889.14 r180 top
P1 "Header 10X2" HDR2X10 2135,3760 r180 top
R1 "1.5Kohm" 0603 2150.82,2510.83 r180 top
R2 "4.32Kohm" 0603 3670,1130 r180 top
R3 "930ohm" 0603 2085.82,2574.83 r0 top
R4 "0.11ohm" 1206 335,2035 r0 top
R5 "3Kohm" 0603 1736.82,2488.83 r180 top
R6 "2.67Kohm" 0603 1625.82,2724.83 r0 top
R8 "3.48Kohm" 0603 1734.82,2598.83 r180 top
R9 "0ohm" 0603 1742.82,2764.83 r90 top
R11 "10kohm" 0603 1450.33,3531.18 r180 top
R12 "10kohm" 0603 1211.33,3531.18 r0 top
R13 "10kohm" 0603 1435.33,3273.74 r270 top
R14 "10kohm" 0603 1269.33,3138.74 r90 top
R15 "10kohm" 0603 1142.33,3531.18 r180 top
R16 "10kohm" 0603 859.33,3526.74 r0 top
R17 "10kohm" 0603 1111.33,3271.96 r270 top
R18 "10kohm" 0603 917.33,3210.74 r270 top
R19 "10kohm" 0603 1211.33,3274.74 r270 top
R20 "10kohm" 0603 859.33,3274.74 r270 top
R21 "1kohm" 0603 2917.82,2593.83 r180 top
R22 "1kohm" 0603 2796.82,2593.83 r180 top
R23 "1kohm" 0603 2671.82,2593.83 r180 top
R24 "0.11ohm" 1206 1674.82,2050.83 r180 top
R30 "0ohm" 0603 4512.05,812 r90 top
R31 "1kohm" 0603 1216.95,2616.97 r0 top
R32 "1kohm" 0603 1340.95,2616.97 r0 top
R33 "1kohm" 0603 1464.95,2616.97 r0 top
R36 "13Kohm" 0603 3720,1020 r90 top
R38 "0.11ohm" 1206 840.31,2047.24 r0 top
R39 "0.11ohm" 1206 2070.31,2037.24 r0 top
R40 "2.67Kohm" 0603 2342.82,2673.83 r180 top
R41 "0.11ohm" 1206 2892.82,2038.83 r180 top
R44 "50ohm" 0201 1215.31,1275.14 r270 top
R46 "20Kohm" 0402 4311.21,857.06 r90 top
R47 "20Kohm" 0402 4371.21,907.06 r270 top
R51 "0ohm" 0603 4512.05,937 r180 top
R52 "0ohm" 0603 2217.82,2723.83 r90 top
R72 "1.5Kohm" 0603 396.82,2483.83 r180 top
R73 "300ohm" 0603 394.82,2593.83 r180 top
SMA_ANA_N "SMA low freq" THRU_SMA_JOHNSON 4227,172 r90 top
SMA_ANA_P "SMA low freq" THRU_SMA_JOHNSON 4626.97,172 r90 top
SMA_ANT_0_N "SMA high freq" THRU_SMD_SMA 4750,3400 r0 top
SMA_ANT_0_P "SMA high freq" THRU_SMD_SMA 4750,2850 r0 top
SMA_ANT_1_N "SMA high freq" THRU_SMD_SMA 3100,2850 r0 top
SMA_ANT_1_P "SMA high freq" THRU_SMD_SMA 3100,3400 r0 top
SMA_ANT_2_N "SMA high freq" THRU_SMD_SMA 3100,1600 r0 top
SMA_ANT_2_P "SMA high freq" THRU_SMD_SMA 3100,1050 r0 top
SMA_ANT_3_N "SMA high freq" THRU_SMD_SMA 4750,1050 r0 top
SMA_ANT_3_P "SMA high freq" THRU_SMD_SMA 4750,1600 r0 top
SMA_DIG_CLK "SMA mid freq" THRU_SMA_JOHNSON_CUTOUT 3860,1100 r0 top
SMA_LINK_RX_N "SMA high freq" THRU_SMD_SMA 5299.21,2485.85 r0 top
SMA_LINK_RX_P "SMA high freq" THRU_SMD_SMA 5299.21,3035.85 r0 top
SMA_LINK_TX_N "SMA high freq" THRU_SMD_SMA 5299.21,1385.85 r0 top
SMA_LINK_TX_P "SMA high freq" THRU_SMD_SMA 5299.21,1935.85 r0 top
SMA_LO_N "SMA high freq" THRU_SMD_SMA 3650,3000 r0 top
SMA_LO_P "SMA high freq" THRU_SMD_SMA 4200,3000 r0 top
SMA_LOAD "SMA high freq" THRU_SMD_SMA 1114.92,1589.92 r270 top
SMA_OPEN "SMA high freq" THRU_SMD_SMA 409.92,1344.92 r270 top
SMA_SHORT "SMA high freq" THRU_SMD_SMA 409.92,784.92 r270 top
SMA_THRU_LINK0 "SMA high freq" THRU_SMD_SMA 2894.9,186.91 r90 top
SMA_THRU_LINK1 "SMA high freq" THRU_SMD_SMA 2634.4,1430.91 r90 top
SMA_THRU_RF0 "SMA high freq" THRU_SMD_SMA 1066.91,280.1 r0 top
SMA_THRU_RF1 "SMA high freq" THRU_SMD_SMA 1825.91,1425.6 r0 top
TP_ANA_N "" Test_Point#1 4285,1060 r90 top
TP_ANA_P "" Test_Point#1 4390,1055 r90 top
TP_DVDD "" Test_Point#1 2599.92,1884.92 r90 top
TP_GATE_LINK "" Test_Point#2 735,1890 r90 top
TP_VDD_BUFFER "" Test_Point#1 4995,810 r90 top
TP_VDD_IO "" Test_Point#1 1385,1885 r90 top
TP_VDD_LINK "" Test_Point#3 2095,1909.92 r90 top
TP_VDDA "" Test_Point#1 814.92,1889.92 r90 top
U1 "TPS74201" TPS74201 892.31,2298.24 r90 top
U2 "" FADER2 3941.38,2411.22 r0 top
U2 "AD5254" AD5254 1935.82,2537.83 r90 top
U3 "TPS74201" TPS74201 2950,2280.31 r90 top
U4 "NLSV4T244DTR2G" 948G-01 1724.41,3363.82 r180 top
U5 "PCA9517" PCA9517 1331.33,3360.74 r270 top
U6 "PCA9517" PCA9517 1012.55,3359.74 r270 top
U7 "NLSV4T244DTR2G" 948G-01 2114.41,3363.82 r180 top
U8 "MAX9612" MAX9612 1176.99,2282 r90 top
U9 "MAX9612" MAX9612 2668.82,2271.83 r90 top
U10 "MAX9612" MAX9612 1443.82,2281.83 r90 top
U12 "TPS74201" TPS74201 1725,2290.31 r90 top
U16 "TPS74201" TPS74201 2122.31,2288.24 r90 top
U19 "LTC6417" LT-UDC-20_N 4335.05,725.84 r180 top
U20 "TPS79650" TI-DRB8-2400X1650TP_V 4650.05,719 r270 top
U21 "TPS74201" TPS74201 385,2285.31 r90 top
U22 "AD5254" AD5254 595.82,2532.83 r90 top
U32 "MAX9612" MAX9612 2406.99,2272 r90 top

## Footprints (in the part's own frame and the unit in brackets; to place one, negate y for a bottom-side part, rotate by r counter-clockwise, add the part's x,y. Pads: shape width x height; smd on the part's side, far side on the other; paste and mask are expansions set on the pad)
0201 [mil]
  rect 15x15 smd: 1(0,0) 2(25,0)
  silkscreen extent -18,-18 43,18
0402 [mil]
  rect 25x20 smd: 1(0,0) 2(50,0)
  silkscreen extent 20,-10 30,10
0603 [mil]
  rect 35x35 smd: 1(0,0) 2(65,0)
  silkscreen extent 25,-18 40,18
948G-01 [mm] "Shrink Small Outline; 14 Leads; Body Width 4.4 mm; Pitch 0.65 mm"
  rect 0.3x1.65 smd: 1(-1.95,-2.775) 2(-1.3,-2.775) 3(-0.65,-2.775) 4(0,-2.775) 5(0.65,-2.775) 6(1.3,-2.775) 7(1.95,-2.775) 8(1.95,2.775) 9(1.3,2.775) 10(0.65,2.775) 11(0,2.775) 12(-0.65,2.775) 13(-1.3,2.775) 14(-1.95,2.775)
  silkscreen extent -2.77,-2.9 2.55,1.55
1206 [mil]
  rect 60x60 smd: 1(0,0) 2(135,0)
  silkscreen extent -50,-50 185,50
1210 [mm] "Chip Capacitor, Body 3.2x2.5mm, Height 2.8mm, IPC Medium Density"
  rect 1.15x2.7 smd: 1(-1.5,0) 2(1.5,0)
  silkscreen extent -0.55,-1.25 0.55,1.25, body extent -1.7,-1.4 1.7,1.4, height 2.8
AD5254 [mm]
  oval 0.35x1.4 smd: 1(-0.614,-2.089) 2(0.036,-2.089) 3(0.686,-2.089) 4(1.336,-2.089) 5(1.986,-2.089) 6(2.636,-2.089) 7(3.286,-2.089) 8(3.936,-2.089) 9(4.586,-2.089) 10(5.236,-2.089) 11(5.236,3.511) 12(4.586,3.511) 13(3.936,3.511) 14(3.286,3.511) 15(2.636,3.511) 16(1.986,3.511) 17(1.336,3.511) 18(0.686,3.511) 19(0.036,3.511) 20(-0.614,3.511)
  silkscreen extent -1.46,-2.21 5.61,2.41, body extent -0.99,-1.54 5.61,2.96, height 1.2
AT224-3 [mil]
  rect 30x65 smd: 1(-50,0) 2(0,0) 3(50,0) 4(50,-125) 6(-50,-125)
  silkscreen extent -131,-190 100,65
FADER2 [mil]
  round 2.5 smd mask+0.16: A2(167.32,-6.69) A3(167.32,-13.39) A4(167.32,-20.08) A5(167.32,-26.77) A6(167.32,-33.47) A7(167.32,-40.16) A8(167.32,-46.85) A9(167.32,-53.54) A10(167.32,-60.24) A11(167.32,-66.93) A12(167.32,-73.62) A13(167.32,-80.32) A14(167.32,-87.01) A15(167.32,-93.7) A16(167.32,-100.4) A17(167.32,-107.09) A18(167.32,-113.78) A19(167.32,-120.47) A20(167.32,-127.17) A21(167.32,-133.86) A22(167.32,-140.55) A23(167.32,-147.25) A24(167.32,-153.94) A25(167.32,-160.63) AA1(33.46,0) AA2(33.46,-6.69) AA3(33.46,-13.39) AA4(33.46,-20.08) AA5(33.46,-26.77) AA6(33.46,-33.46) AA7(33.46,-40.16) AA8(33.46,-46.85) AA9(33.46,-53.54) AA10(33.46,-60.24) AA11(33.46,-66.93) AA12(33.46,-73.62) AA13(33.46,-80.31) AA14(33.46,-87.01) AA15(33.46,-93.7) AA16(33.46,-100.39) AA17(33.46,-107.09) AA18(33.46,-113.78) AA19(33.46,-120.47) AA20(33.46,-127.17) AA21(33.46,-133.86) AA22(33.46,-140.55) AA23(33.46,-147.24) AA24(33.46,-153.94) AA25(33.46,-160.63) AA26(33.46,-167.32) AB1(26.77,0) AB2(26.77,-6.69) AB3(26.77,-13.39) AB4(26.77,-20.08) AB5(26.77,-26.77) AB6(26.77,-33.46) AB7(26.77,-40.16) AB8(26.77,-46.85) AB9(26.77,-53.54) AB10(26.77,-60.24) AB11(26.77,-66.93) AB12(26.77,-73.62) AB13(26.77,-80.31) AB14(26.77,-87.01) AB15(26.77,-93.7) AB16(26.77,-100.39) AB17(26.77,-107.09) AB18(26.77,-113.78) AB19(26.77,-120.47) AB20(26.77,-127.17) AB21(26.77,-133.86) AB22(26.77,-140.55) AB23(26.77,-147.24) AB24(26.77,-153.94) AB25(26.77,-160.63) AB26(26.77,-167.32) AC1(20.08,0) AC2(20.08,-6.69) AC3(20.08,-13.39) AC4(20.08,-20.08) AC5(20.08,-26.77) AC6(20.08,-33.46) AC7(20.08,-40.16) AC8(20.08,-46.85) AC9(20.08,-53.54) AC11(20.08,-66.93) AC12(20.08,-73.62) AC14(20.08,-87.01) AC15(20.08,-93.7) AC17(20.08,-107.09) AC18(20.08,-113.78) AC20(20.08,-127.17) AC21(20.08,-133.86) AC22(20.08,-140.55) AC23(20.08,-147.24) AC24(20.08,-153.94) AC25(20.08,-160.63) AC26(20.08,-167.32) AD1(13.39,0) AD2(13.39,-6.69) AD3(13.39,-13.39) AD4(13.39,-20.08) AD5(13.39,-26.77) AD6(13.39,-33.46) AD7(13.39,-40.16) AD8(13.39,-46.85) AD9(13.39,-53.54) AD11(13.39,-66.93) AD12(13.39,-73.62) AD14(13.39,-87.01) AD15(13.39,-93.7) AD17(13.39,-107.09) AD18(13.39,-113.78) AD20(13.39,-127.17) AD21(13.39,-133.86) AD22(13.39,-140.55) AD23(13.39,-147.24) AD24(13.39,-153.94) AD25(13.39,-160.63) AD26(13.39,-167.32) AE1(6.69,0) AE2(6.69,-6.69) AE3(6.69,-13.39) AE4(6.69,-20.08) AE5(6.69,-26.77) AE6(6.69,-33.46) AE7(6.69,-40.16) AE8(6.69,-46.85) AE9(6.69,-53.54) AE11(6.69,-66.93) AE12(6.69,-73.62) AE14(6.69,-87.01) AE15(6.69,-93.7) AE17(6.69,-107.09) AE18(6.69,-113.78) AE20(6.69,-127.17) AE21(6.69,-133.86) AE22(6.69,-140.55) AE23(6.69,-147.24) AE24(6.69,-153.94) AE25(6.69,-160.63) AE26(6.69,-167.32) AF2(0,-6.69) AF3(0,-13.39) AF4(0,-20.08) AF5(0,-26.77) AF6(0,-33.46) AF7(0,-40.16) AF8(0,-46.85) AF9(0,-53.54) AF10(0,-60.24) AF11(0,-66.93) AF12(0,-73.62) AF13(0,-80.31) AF14(0,-87.01) AF15(0,-93.7) AF16(0,-100.39) AF17(0,-107.09) AF18(0,-113.78) AF19(0,-120.47) AF20(0,-127.17) AF21(0,-133.86) AF22(0,-140.55) AF23(0,-147.24) AF24(0,-153.94) AF25(0,-160.63) B1(160.63,0) B3(160.63,-13.39) B4(160.63,-20.08) B5(160.63,-26.77) B6(160.63,-33.47) B7(160.63,-40.16) B8(160.63,-46.85) B9(160.63,-53.54) B11(160.63,-66.93) B12(160.63,-73.62) B14(160.63,-87.01) B15(160.63,-93.7) B17(160.63,-107.09) B18(160.63,-113.78) B20(160.63,-127.17) B21(160.63,-133.86) B22(160.63,-140.55) B23(160.63,-147.25) B24(160.63,-153.94) B25(160.63,-160.63) B26(160.63,-167.33) C1(153.94,0) C2(153.94,-6.69) C3(153.94,-13.39) C4(153.94,-20.08) C5(153.94,-26.77) C6(153.94,-33.47) C7(153.94,-40.16) C8(153.94,-46.85) C9(153.94,-53.54) C11(153.94,-66.93) C12(153.94,-73.62) C14(153.94,-87.01) C15(153.94,-93.7) C17(153.94,-107.09) C18(153.94,-113.78) C20(153.94,-127.17) C21(153.94,-133.86) C22(153.94,-140.55) C23(153.94,-147.25) C24(153.94,-153.94) C25(153.94,-160.63) C26(153.94,-167.33) D1(147.25,0) D2(147.25,-6.69) D3(147.25,-13.39) D4(147.25,-20.08) D5(147.25,-26.77) D6(147.25,-33.47) D7(147.25,-40.16) D8(147.25,-46.85) D9(147.25,-53.54) D11(147.25,-66.93) D12(147.25,-73.62) D14(147.25,-87.01) D15(147.25,-93.7) D17(147.25,-107.09) D18(147.25,-113.78) D20(147.25,-127.17) D21(147.25,-133.86) D22(147.25,-140.55) D23(147.25,-147.25) D24(147.25,-153.94) D25(147.25,-160.63) D26(147.25,-167.33) E1(140.55,0) E2(140.55,-6.69) E3(140.55,-13.39) E4(140.55,-20.08) E5(140.55,-26.77) E6(140.55,-33.47) E7(140.55,-40.16) E8(140.55,-46.85) E9(140.55,-53.54) E10(140.55,-60.24) E11(140.55,-66.93) E12(140.55,-73.62) E13(140.55,-80.32) E14(140.55,-87.01) E15(140.55,-93.7) E16(140.55,-100.4) E17(140.55,-107.09) E18(140.55,-113.78) E19(140.55,-120.47) E20(140.55,-127.17) E21(140.55,-133.86) E22(140.55,-140.55) E23(140.55,-147.25) E24(140.55,-153.94) E25(140.55,-160.63) E26(140.55,-167.33) F1(133.86,0) F2(133.86,-6.69) F3(133.86,-13.39) F4(133.86,-20.08) F5(133.86,-26.77) F6(133.86,-33.47) F7(133.86,-40.16) F8(133.86,-46.85) F9(133.86,-53.54) F10(133.86,-60.24) F11(133.86,-66.93) F12(133.86,-73.62) F13(133.86,-80.32) F14(133.86,-87.01) F15(133.86,-93.7) F16(133.86,-100.4) F17(133.86,-107.09) F18(133.86,-113.78) F19(133.86,-120.47) F20(133.86,-127.17) F21(133.86,-133.86) F22(133.86,-140.55) F23(133.86,-147.25) F24(133.86,-153.94) F25(133.86,-160.63) F26(133.86,-167.33) G1(127.17,0) G2(127.17,-6.69) G3(127.17,-13.39) G4(127.17,-20.08) G5(127.17,-26.77) G6(127.17,-33.47) G7(127.17,-40.16) G8(127.17,-46.85) G9(127.17,-53.54) G10(127.17,-60.24) G11(127.17,-66.93) G12(127.17,-73.62) G13(127.17,-80.32) G14(127.17,-87.01) G15(127.17,-93.7) G16(127.17,-100.4) G17(127.17,-107.09) G18(127.17,-113.78) G19(127.17,-120.47) G20(127.17,-127.17) G21(127.17,-133.86) G22(127.17,-140.55) G23(127.17,-147.25) G24(127.17,-153.94) G25(127.17,-160.63) G26(127.17,-167.33) H1(120.47,0) H2(120.47,-6.69) H3(120.47,-13.39) H4(120.47,-20.08) H5(120.47,-26.77) H6(120.47,-33.47) H7(120.47,-40.16) H8(120.47,-46.85) H9(120.47,-53.54) H10(120.47,-60.24) H11(120.47,-66.93) H12(120.47,-73.62) H13(120.47,-80.32) H14(120.47,-87.01) H15(120.47,-93.7) H16(120.47,-100.4) H17(120.47,-107.09) H18(120.47,-113.78) H19(120.47,-120.47) H20(120.47,-127.17) H21(120.47,-133.86) H22(120.47,-140.55) H23(120.47,-147.25) H24(120.47,-153.94) H25(120.47,-160.63) H26(120.47,-167.33) J1(113.78,0) J2(113.78,-6.69) J3(113.78,-13.39) J4(113.78,-20.08) J5(113.78,-26.77) J6(113.78,-33.47) J7(113.78,-40.16) J8(113.78,-46.85) J9(113.78,-53.54) J10(113.78,-60.24) J11(113.78,-66.93) J12(113.78,-73.62) J13(113.78,-80.32) J14(113.78,-87.01) J15(113.78,-93.7) J16(113.78,-100.4) J17(113.78,-107.09) J18(113.78,-113.78) J19(113.78,-120.47) J20(113.78,-127.17) J21(113.78,-133.86) J22(113.78,-140.55) J23(113.78,-147.25) J24(113.78,-153.94) J25(113.78,-160.63) J26(113.78,-167.33) K1(107.09,0) K2(107.09,-6.69) K3(107.09,-13.39) K4(107.09,-20.08) K5(107.09,-26.77) K6(107.09,-33.47) K7(107.09,-40.16) K8(107.09,-46.85) K9(107.09,-53.54) K10(107.09,-60.24) K11(107.09,-66.93) K12(107.09,-73.62) K13(107.09,-80.32) K14(107.09,-87.01) K15(107.09,-93.7) K16(107.09,-100.4) K17(107.09,-107.09) K18(107.09,-113.78) K19(107.09,-120.47) K20(107.09,-127.17) K21(107.09,-133.86) K22(107.09,-140.55) K23(107.09,-147.25) K24(107.09,-153.94) K25(107.09,-160.63) K26(107.09,-167.33) L1(100.39,0) L2(100.39,-6.69) L3(100.39,-13.39) L4(100.39,-20.08) L5(100.39,-26.77) L6(100.39,-33.47) L7(100.39,-40.16) L8(100.39,-46.85) L9(100.39,-53.54) L10(100.39,-60.24) L11(100.39,-66.93) L12(100.39,-73.62) L13(100.39,-80.32) L14(100.39,-87.01) L15(100.39,-93.7) L16(100.39,-100.4) L17(100.39,-107.09) L18(100.39,-113.78) L19(100.39,-120.47) L20(100.39,-127.17) L21(100.39,-133.86) L22(100.39,-140.55) L23(100.39,-147.25) L24(100.39,-153.94) L25(100.39,-160.63) L26(100.39,-167.33) M1(93.7,0) M2(93.7,-6.69) M3(93.7,-13.39) M4(93.7,-20.08) M5(93.7,-26.77) M6(93.7,-33.47) M7(93.7,-40.16) M8(93.7,-46.85) M9(93.7,-53.54) M10(93.7,-60.24) M11(93.7,-66.93) M12(93.7,-73.62) M13(93.7,-80.32) M14(93.7,-87.01) M15(93.7,-93.7) M16(93.7,-100.4) M17(93.7,-107.09) M18(93.7,-113.78) M19(93.7,-120.47) M20(93.7,-127.17) M21(93.7,-133.86) M22(93.7,-140.55) M23(93.7,-147.25) M24(93.7,-153.94) M25(93.7,-160.63) M26(93.7,-167.33) N1(87.01,0) N2(87.01,-6.69) N3(87.01,-13.39) N4(87.01,-20.08) N5(87.01,-26.77) N6(87.01,-33.47) N7(87.01,-40.16) N8(87.01,-46.85) N9(87.01,-53.54) N10(87.01,-60.24) N11(87.01,-66.93) N12(87.01,-73.62) N13(87.01,-80.32) N14(87.01,-87.01) N15(87.01,-93.7) N16(87.01,-100.4) N17(87.01,-107.09) N18(87.01,-113.78) N19(87.01,-120.47) N20(87.01,-127.17) N21(87.01,-133.86) N22(87.01,-140.55) N23(87.01,-147.25) N24(87.01,-153.94) N25(87.01,-160.63) N26(87.01,-167.33) P1(80.32,0) P2(80.32,-6.69) P3(80.32,-13.39) P5(80.32,-26.77) P6(80.32,-33.47) P8(80.32,-46.85) P9(80.32,-53.54) P10(80.32,-60.24) P11(80.32,-66.93) P12(80.32,-73.62) P13(80.32,-80.32) P14(80.32,-87.01) P15(80.32,-93.7) P16(80.32,-100.4) P17(80.32,-107.09) P18(80.32,-113.78) P19(80.32,-120.47) P21(80.32,-133.86) P22(80.32,-140.55) P24(80.32,-153.94) P25(80.32,-160.63) P26(80.32,-167.33) R1(73.62,0) R2(73.62,-6.69) R3(73.62,-13.39) R5(73.62,-26.77) R6(73.62,-33.47) R8(73.62,-46.85) R9(73.62,-53.54) R10(73.62,-60.24) R11(73.62,-66.93) R12(73.62,-73.62) R13(73.62,-80.32) R14(73.62,-87.01) R15(73.62,-93.7) R16(73.62,-100.4) R17(73.62,-107.09) R18(73.62,-113.78) R19(73.62,-120.47) R21(73.62,-133.86) R22(73.62,-140.55) R24(73.62,-153.94) R25(73.62,-160.63) R26(73.62,-167.33) T1(66.93,0) T2(66.93,-6.69) T3(66.93,-13.39) T5(66.93,-26.77) T6(66.93,-33.47) T8(66.93,-46.85) T9(66.93,-53.54) T10(66.93,-60.24) T11(66.93,-66.93) T12(66.93,-73.62) T13(66.93,-80.32) T14(66.93,-87.01) T15(66.93,-93.7) T16(66.93,-100.4) T17(66.93,-107.09) T18(66.93,-113.78) T19(66.93,-120.47) T21(66.93,-133.86) T22(66.93,-140.55) T24(66.93,-153.94) T25(66.93,-160.63) T26(66.93,-167.33) U1(60.24,0) U2(60.24,-6.69) U3(60.24,-13.39) U4(60.24,-20.08) U5(60.24,-26.77) U6(60.24,-33.47) U7(60.24,-40.16) U8(60.24,-46.85) U9(60.24,-53.54) U10(60.24,-60.24) U11(60.24,-66.93) U12(60.24,-73.62) U13(60.24,-80.32) U14(60.24,-87.01) U15(60.24,-93.7) U16(60.24,-100.4) U17(60.24,-107.09) U18(60.24,-113.78) U19(60.24,-120.47) U20(60.24,-127.17) U21(60.24,-133.86) U22(60.24,-140.55) U23(60.24,-147.25) U24(60.24,-153.94) U25(60.24,-160.63) U26(60.24,-167.33) V1(53.54,0) V2(53.54,-6.69) V3(53.54,-13.39) V4(53.54,-20.08) V5(53.54,-26.77) V6(53.54,-33.47) V7(53.54,-40.16) V8(53.54,-46.85) V9(53.54,-53.54) V10(53.54,-60.24) V11(53.54,-66.93) V12(53.54,-73.62) V13(53.54,-80.32) V14(53.54,-87.01) V15(53.54,-93.7) V16(53.54,-100.4) V17(53.54,-107.09) V18(53.54,-113.78) V19(53.54,-120.47) V20(53.54,-127.17) V21(53.54,-133.86) V22(53.54,-140.55) V23(53.54,-147.25) V24(53.54,-153.94) V25(53.54,-160.63) V26(53.54,-167.33) W1(46.85,0) W2(46.85,-6.69) W3(46.85,-13.39) W4(46.85,-20.08) W5(46.85,-26.77) W6(46.85,-33.47) W7(46.85,-40.16) W8(46.85,-46.85) W9(46.85,-53.54) W10(46.85,-60.24) W11(46.85,-66.93) W12(46.85,-73.62) W13(46.85,-80.32) W14(46.85,-87.01) W15(46.85,-93.7) W16(46.85,-100.4) W17(46.85,-107.09) W18(46.85,-113.78) W19(46.85,-120.47) W20(46.85,-127.17) W21(46.85,-133.86) W22(46.85,-140.55) W23(46.85,-147.25) W24(46.85,-153.94) W25(46.85,-160.63) W26(46.85,-167.33) Y1(40.16,0) Y2(40.16,-6.69) Y3(40.16,-13.39) Y4(40.16,-20.08) Y5(40.16,-26.77) Y6(40.16,-33.47) Y7(40.16,-40.16) Y8(40.16,-46.85) Y9(40.16,-53.54) Y10(40.16,-60.24) Y11(40.16,-66.93) Y12(40.16,-73.62) Y13(40.16,-80.32) Y14(40.16,-87.01) Y15(40.16,-93.7) Y16(40.16,-100.4) Y17(40.16,-107.09) Y18(40.16,-113.78) Y19(40.16,-120.47) Y20(40.16,-127.17) Y21(40.16,-133.86) Y22(40.16,-140.55) Y23(40.16,-147.25) Y24(40.16,-153.94) Y25(40.16,-160.63) Y26(40.16,-167.33)
  silkscreen extent -20,-190 187,20
HDR1X2 [mm] "Connector; Header; 2 Position"
  rect 1.5x1.5 hole 0.9: 1(0,0)
  round 1.5 hole 0.9: 2(2.54,0)
  silkscreen extent -1.27,-1.27 3.81,1.27
HDR1X3 [mm] "Connector; Header; 3 Position"
  rect 1.5x1.5 hole 0.9: 1(0,0)
  round 1.5 hole 0.9: 2(2.54,0) 3(5.08,0)
  silkscreen extent -1.27,-1.27 6.35,1.27
HDR2X6 [mm] "Connector; Header; 6x2 Position"
  rect 1.5x1.5 hole 0.9: 1(0,0)
  round 1.5 hole 0.9: 2(0,2.54) 3(2.54,0) 4(2.54,2.54) 5(5.08,0) 6(5.08,2.54) 7(7.62,0) 8(7.62,2.54) 9(10.16,0) 10(10.16,2.54) 11(12.7,0) 12(12.7,2.54)
  silkscreen extent -1.27,-1.27 13.97,3.81
HDR2X10 [mm] "Connector; Header; 10x2 Position"
  rect 1.5x1.5 hole 0.9: 1(0,0)
  round 1.5 hole 0.9: 2(0,2.54) 3(2.54,0) 4(2.54,2.54) 5(5.08,0) 6(5.08,2.54) 7(7.62,0) 8(7.62,2.54) 9(10.16,0) 10(10.16,2.54) 11(12.7,0) 12(12.7,2.54) 13(15.24,0) 14(15.24,2.54) 15(17.78,0) 16(17.78,2.54) 17(20.32,0) 18(20.32,2.54) 19(22.86,0) 20(22.86,2.54)
  silkscreen extent -1.27,-1.27 24.13,3.81
LT-UDC-20_N [mm] "QFN, 20-Leads, Body 4x3mm, Pitch 0.5mm, Thermal Pad 2.5x1.5mm, IPC Medium Density"
  oval 0.8x0.3 smd: 1(-1.5,1.25) 2(-1.5,0.75) 3(-1.5,0.25) 4(-1.5,-0.25) 5(-1.5,-0.75) 6(-1.5,-1.25) 11(1.5,-1.25) 12(1.5,-0.75) 13(1.5,-0.25) 14(1.5,0.25) 15(1.5,0.75) 16(1.5,1.25)
  oval 0.3x0.8 smd: 7(-0.75,-2) 8(-0.25,-2) 9(0.25,-2) 10(0.75,-2) 17(0.75,2) 18(0.25,2) 19(-0.25,2) 20(-0.75,2)
  rect 1.65x2.65 smd: 21(0,0)
  silkscreen extent -2.48,-2.2 1.7,2.2, body extent -1.55,-2.05 1.55,2.05, height 0.8
MAX9612 [mm] "SOP, 10-Leads, Body 3x3mm, Pitch 0.5mm, IPC Medium Density"
  oval 1.65x0.3 smd: 1(-2.05,1) 2(-2.05,0.5) 3(-2.05,0) 4(-2.05,-0.5) 5(-2.05,-1) 6(2.05,-1) 7(2.05,-0.5) 8(2.05,0) 9(2.05,0.5) 10(2.05,1)
  silkscreen extent -2.17,-1.52 0.82,1.82, body extent -1.55,-1.55 1.55,1.55, height 1.1
PCA9517 [mm] "VSSOP, 8-Leads, Body 3x3mm, Pitch 0.65mm"
  rect 1.45x0.45 smd paste+0 mask+0.05: 1(-2.2,0.975) 2(-2.2,0.325) 3(-2.2,-0.325) 4(-2.2,-0.975) 5(2.2,-0.975) 6(2.2,-0.325) 7(2.2,0.325) 8(2.2,0.975)
  silkscreen extent -3.6,-1.5 1.07,1.5, body extent -1.5,-1.5 1.5,1.5, height 1.1
Test_Point#1 [mil]
  round 40 hole 20: 1(0,0)
Test_Point#2 [mil]
  round 40 hole 20: 1(0,500)
Test_Point#3 [mil]
  round 40 hole 20: 1(-19.92,0)
THRU_SMA_JOHNSON [mil]
  round 100 hole 62: 1(100,100)
  round 100 hole 67: 2(0,200) 3(200,200) 4(200,0) 5(0,0)
  silkscreen extent -46,-46 246,246
THRU_SMA_JOHNSON_CUTOUT [mil]
  round 100 hole 62: 1(100,100)
  round 100 hole 67: 2(0,200) 3(200,200) 4(200,0) 5(0,0)
  TOP pour cut-out: 100,10.89 65.9,17.68 36.99,36.99 17.68,65.9 10.89,100 10.89,100 17.68,134.1 36.99,163.01 65.9,182.32 100,189.11 100,189.11 134.1,182.32 163.01,163.01 182.32,134.1 189.11,100 189.11,100 182.32,65.9 163.01,36.99 134.1,17.68 100,10.89
  BOT pour cut-out: 100,10.89 65.9,17.68 36.99,36.99 17.68,65.9 10.89,100 10.89,100 17.68,134.1 36.99,163.01 65.9,182.32 100,189.11 100,189.11 134.1,182.32 163.01,163.01 182.32,134.1 189.11,100 189.11,100 182.32,65.9 163.01,36.99 134.1,17.68 100,10.89
  silkscreen extent -46,-46 246,246
THRU_SMD_SMA [mil]
  round 75 smd: 1(100,100)
  round 87 hole 67: 2(0,200) 3(200,0) 4(200,200) 5(0,0)
  TOP pour cut-out: 100,10.89 65.9,17.68 36.99,36.99 17.68,65.9 10.89,100 10.89,100 17.68,134.1 36.99,163.01 65.9,182.32 100,189.11 100,189.11 134.1,182.32 163.01,163.01 182.32,134.1 189.11,100 189.11,100 182.32,65.9 163.01,36.99 134.1,17.68 100,10.89
  BOT pour cut-out: 100,10.89 65.9,17.68 36.99,36.99 17.68,65.9 10.89,100 10.89,100 17.68,134.1 36.99,163.01 65.9,182.32 100,189.11 100,189.11 134.1,182.32 163.01,163.01 182.32,134.1 189.11,100 189.11,100 182.32,65.9 163.01,36.99 134.1,17.68 100,10.89
  GND1 region: 100,189.11 134.1,182.32 163.01,163.01 182.32,134.1 189.11,100 189.11,100 182.32,65.9 163.01,36.99 134.1,17.68 100,10.89 100,10.89 65.9,17.68 36.99,36.99 17.68,65.9 10.89,100 10.89,100 17.68,134.1 36.99,163.01 65.9,182.32 100,189.11
  PWR1 region: 100,189.11 134.1,182.32 163.01,163.01 182.32,134.1 189.11,100 189.11,100 182.32,65.9 163.01,36.99 134.1,17.68 100,10.89 100,10.89 65.9,17.68 36.99,36.99 17.68,65.9 10.89,100 10.89,100 17.68,134.1 36.99,163.01 65.9,182.32 100,189.11
  PWR2 region: 100,189.11 134.1,182.32 163.01,163.01 182.32,134.1 189.11,100 189.11,100 182.32,65.9 163.01,36.99 134.1,17.68 100,10.89 100,10.89 65.9,17.68 36.99,36.99 17.68,65.9 10.89,100 10.89,100 17.68,134.1 36.99,163.01 65.9,182.32 100,189.11
  GND4 region: 100,189.11 134.1,182.32 163.01,163.01 182.32,134.1 189.11,100 189.11,100 182.32,65.9 163.01,36.99 134.1,17.68 100,10.89 100,10.89 65.9,17.68 36.99,36.99 17.68,65.9 10.89,100 10.89,100 17.68,134.1 36.99,163.01 65.9,182.32 100,189.11
  silkscreen extent -75,-75 275,275
TI-DRB8-2400X1650TP_V [mm] "SON, 8-Leads, Body 3x3mm, Pitch 0.65mm, Thermal Pad 2.4x1.65mm"
  rect 0.85x0.35 smd: 1(-1.475,0.975) 2(-1.475,0.325) 3(-1.475,-0.325) 4(-1.475,-0.975) 5(1.475,-0.975) 6(1.475,-0.325) 7(1.475,0.325) 8(1.475,0.975)
  rect 1.65x2.4 smd: 9(0,0)
  silkscreen extent -2.02,-1.58 1.57,1.62, body extent -1.5,-1.5 1.5,1.5, height 1
TPS74201 [mm] "QFN, 20-Leads, Body 5x5mm, Pitch 0.65mm, Thermal Pad 3.4x3.4mm, IPC Medium Density"
  oval 1x0.35 smd: 1(-2.4,1.3) 2(-2.4,0.65) 3(-2.4,0) 4(-2.4,-0.65) 5(-2.4,-1.3) 11(2.4,-1.3) 12(2.4,-0.65) 13(2.4,0) 14(2.4,0.65) 15(2.4,1.3)
  oval 0.35x1 smd: 6(-1.3,-2.4) 7(-0.65,-2.4) 8(0,-2.4) 9(0.65,-2.4) 10(1.3,-2.4) 16(1.3,2.4) 17(0.65,2.4) 18(0,2.4) 19(-0.65,2.4) 20(-1.3,2.4)
  rect 3.15x3.15 smd paste-3.15: 21(0,0)
  silkscreen extent -3.45,-2.67 2.68,2.68, body extent -2.52,-2.52 2.53,2.53, height 1